# EAGLE board SparkFun_TensorFlow_Ambiq_Apollo3-Panel (EAGLE 9.2.2), part 1 of 5
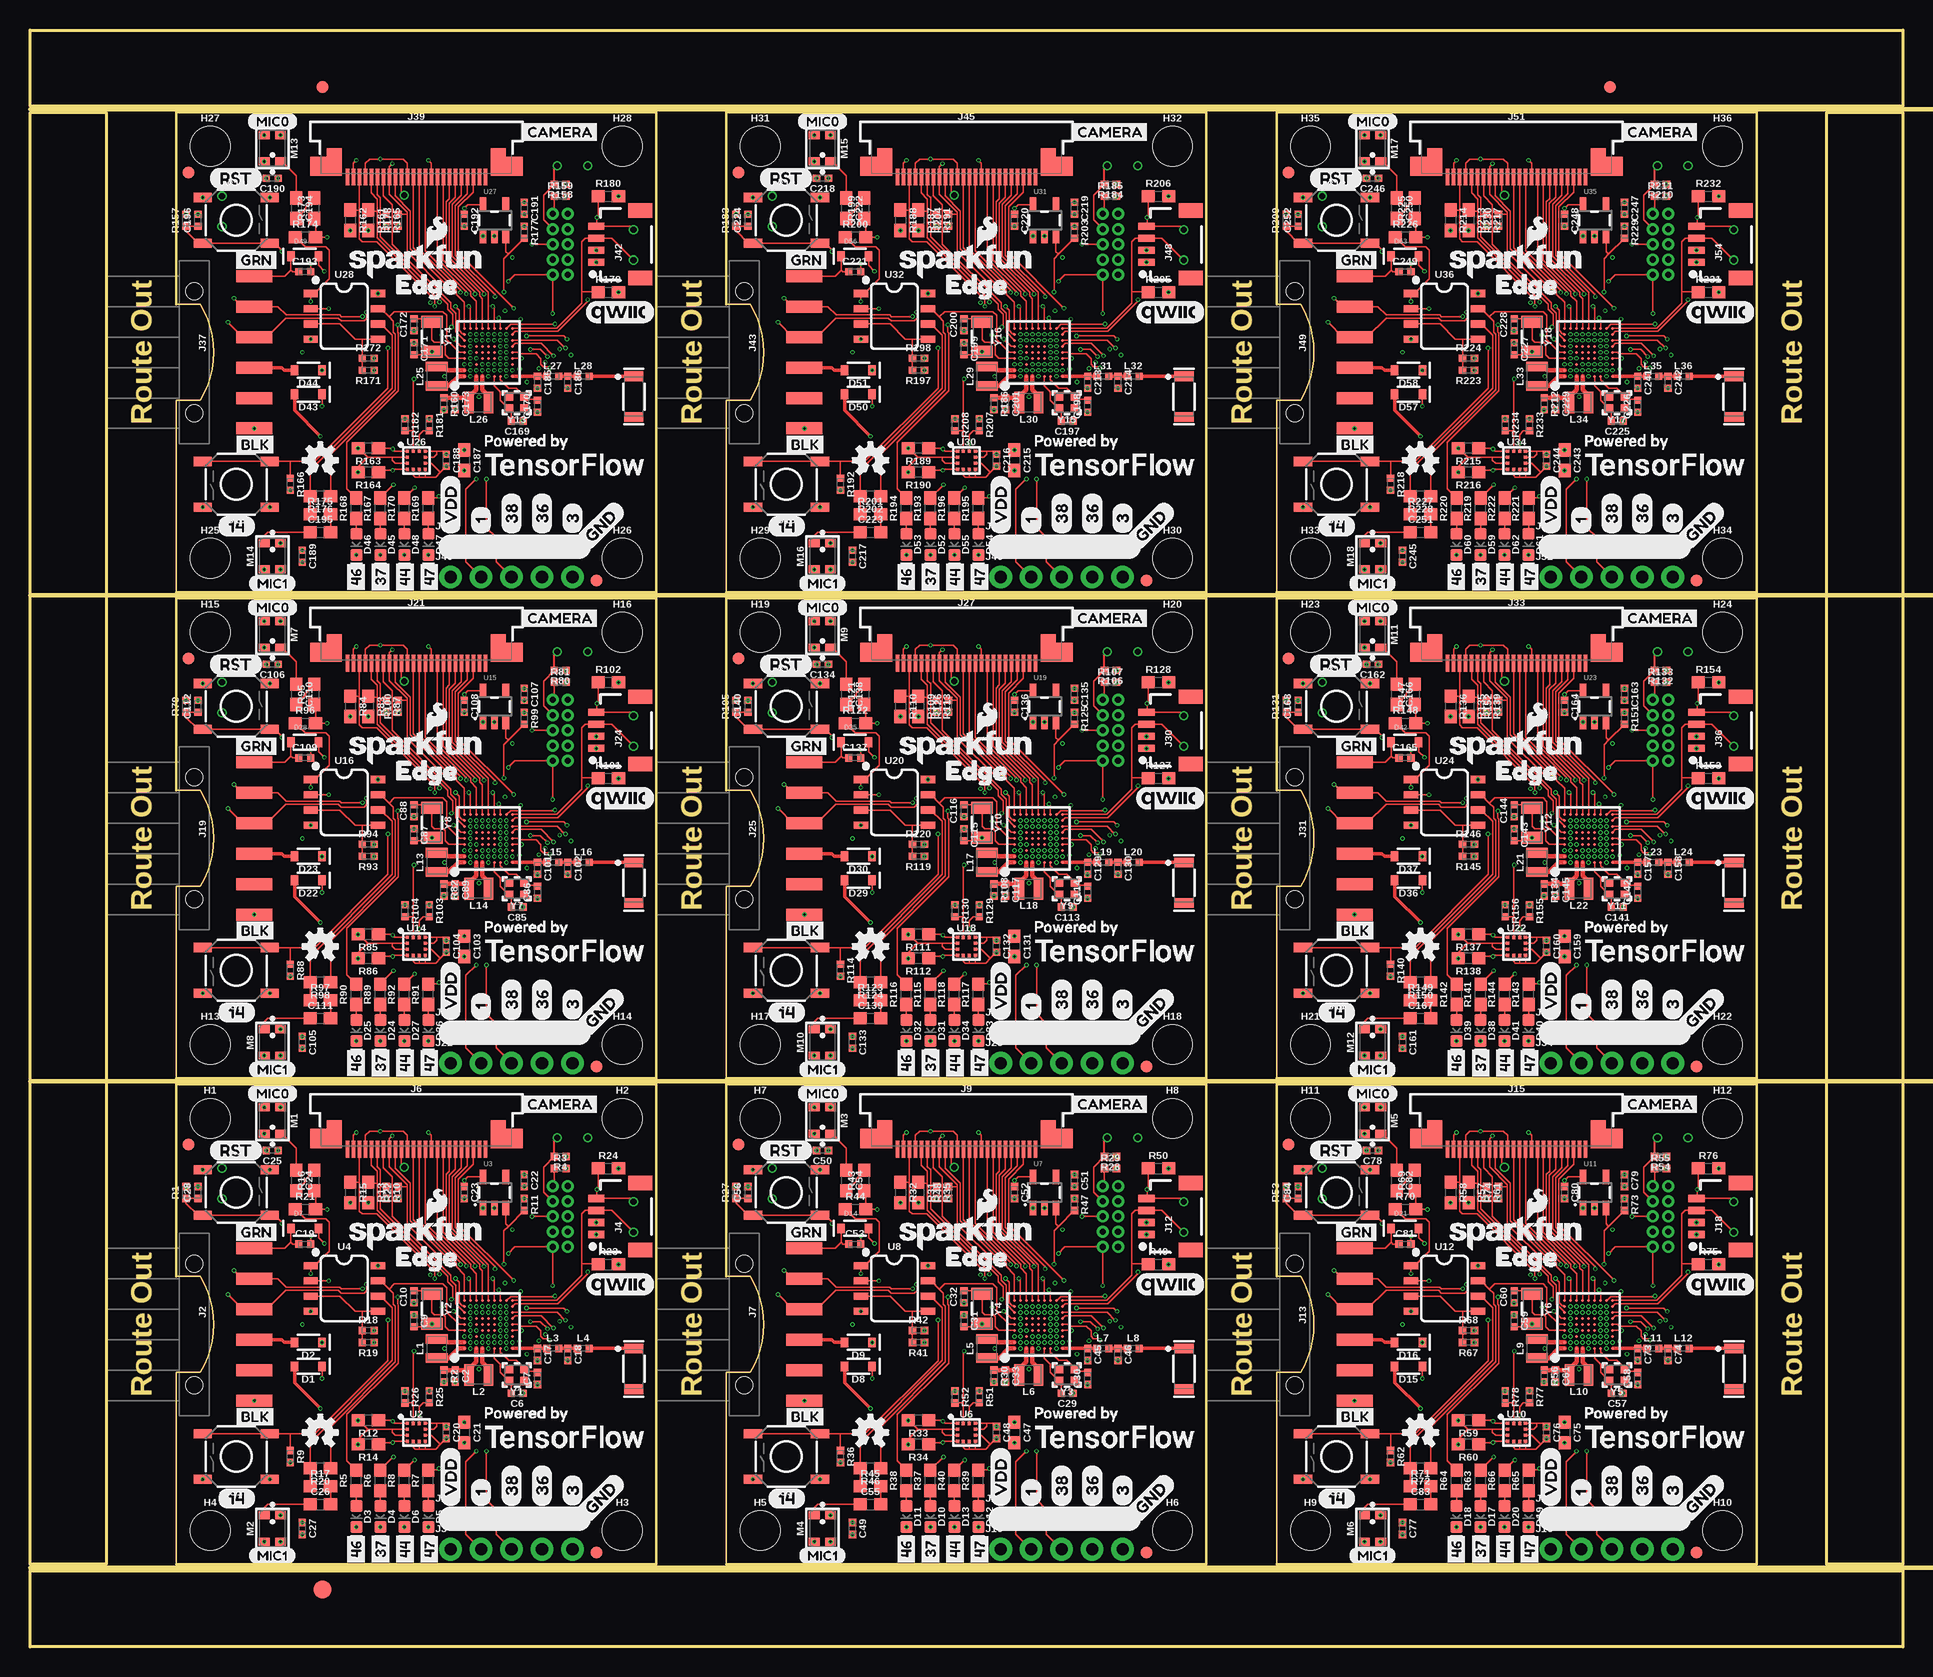
[diagram p0: board, top side]
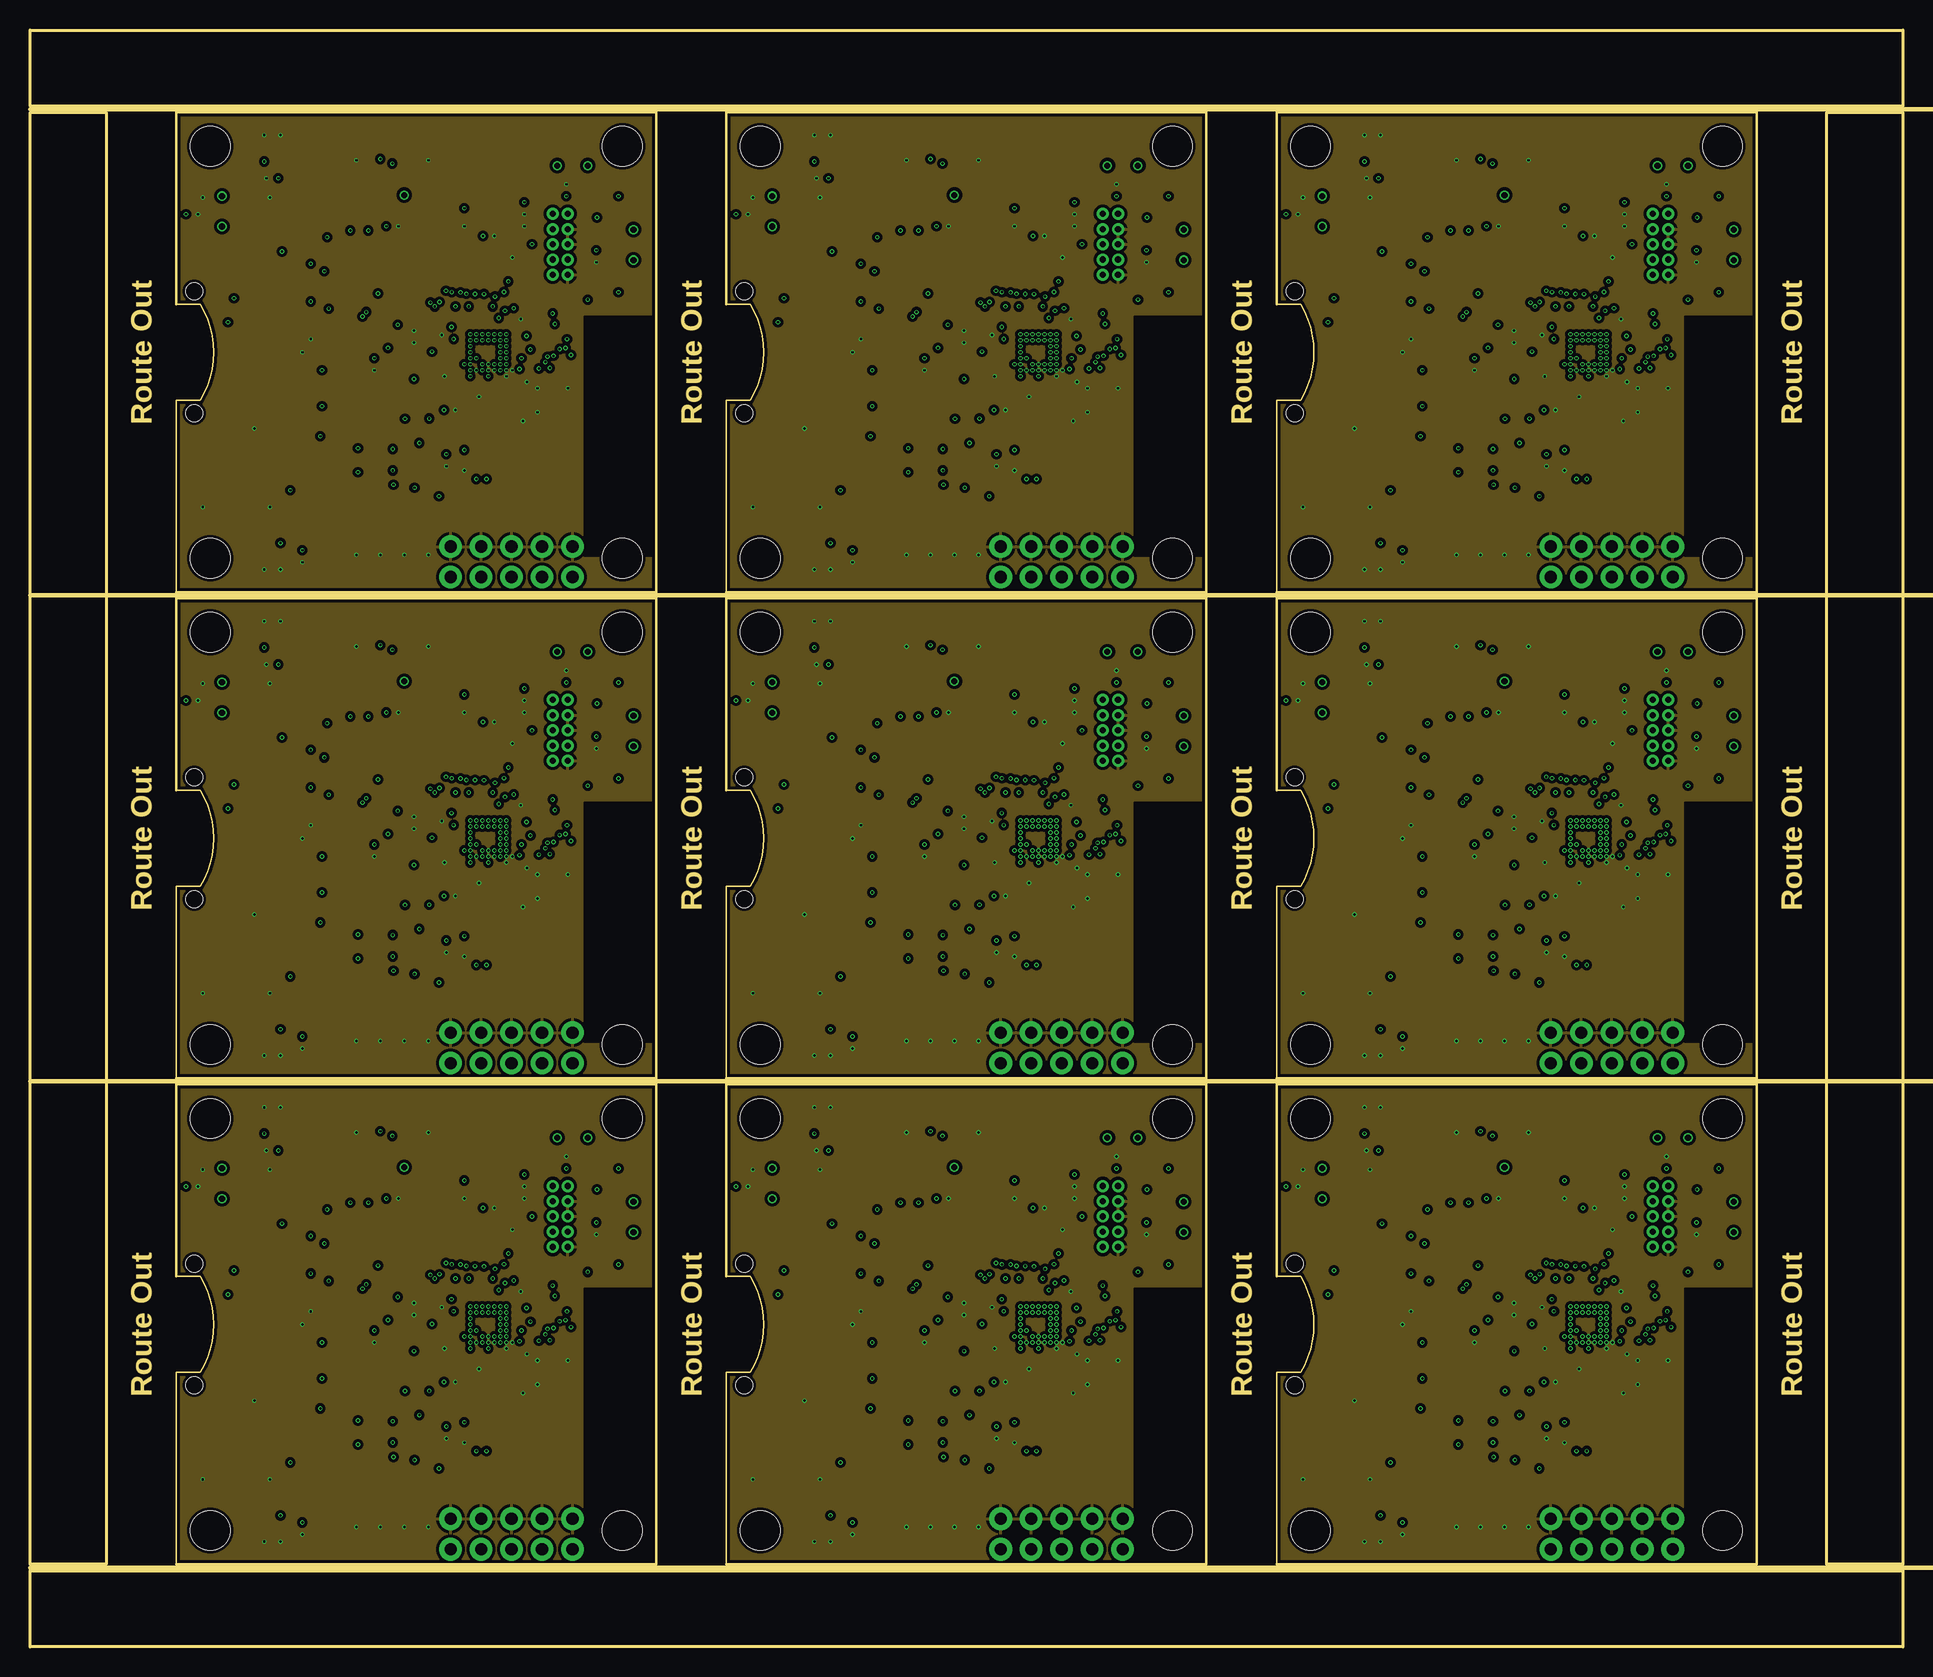
[diagram p1: board, inner layer Route2]
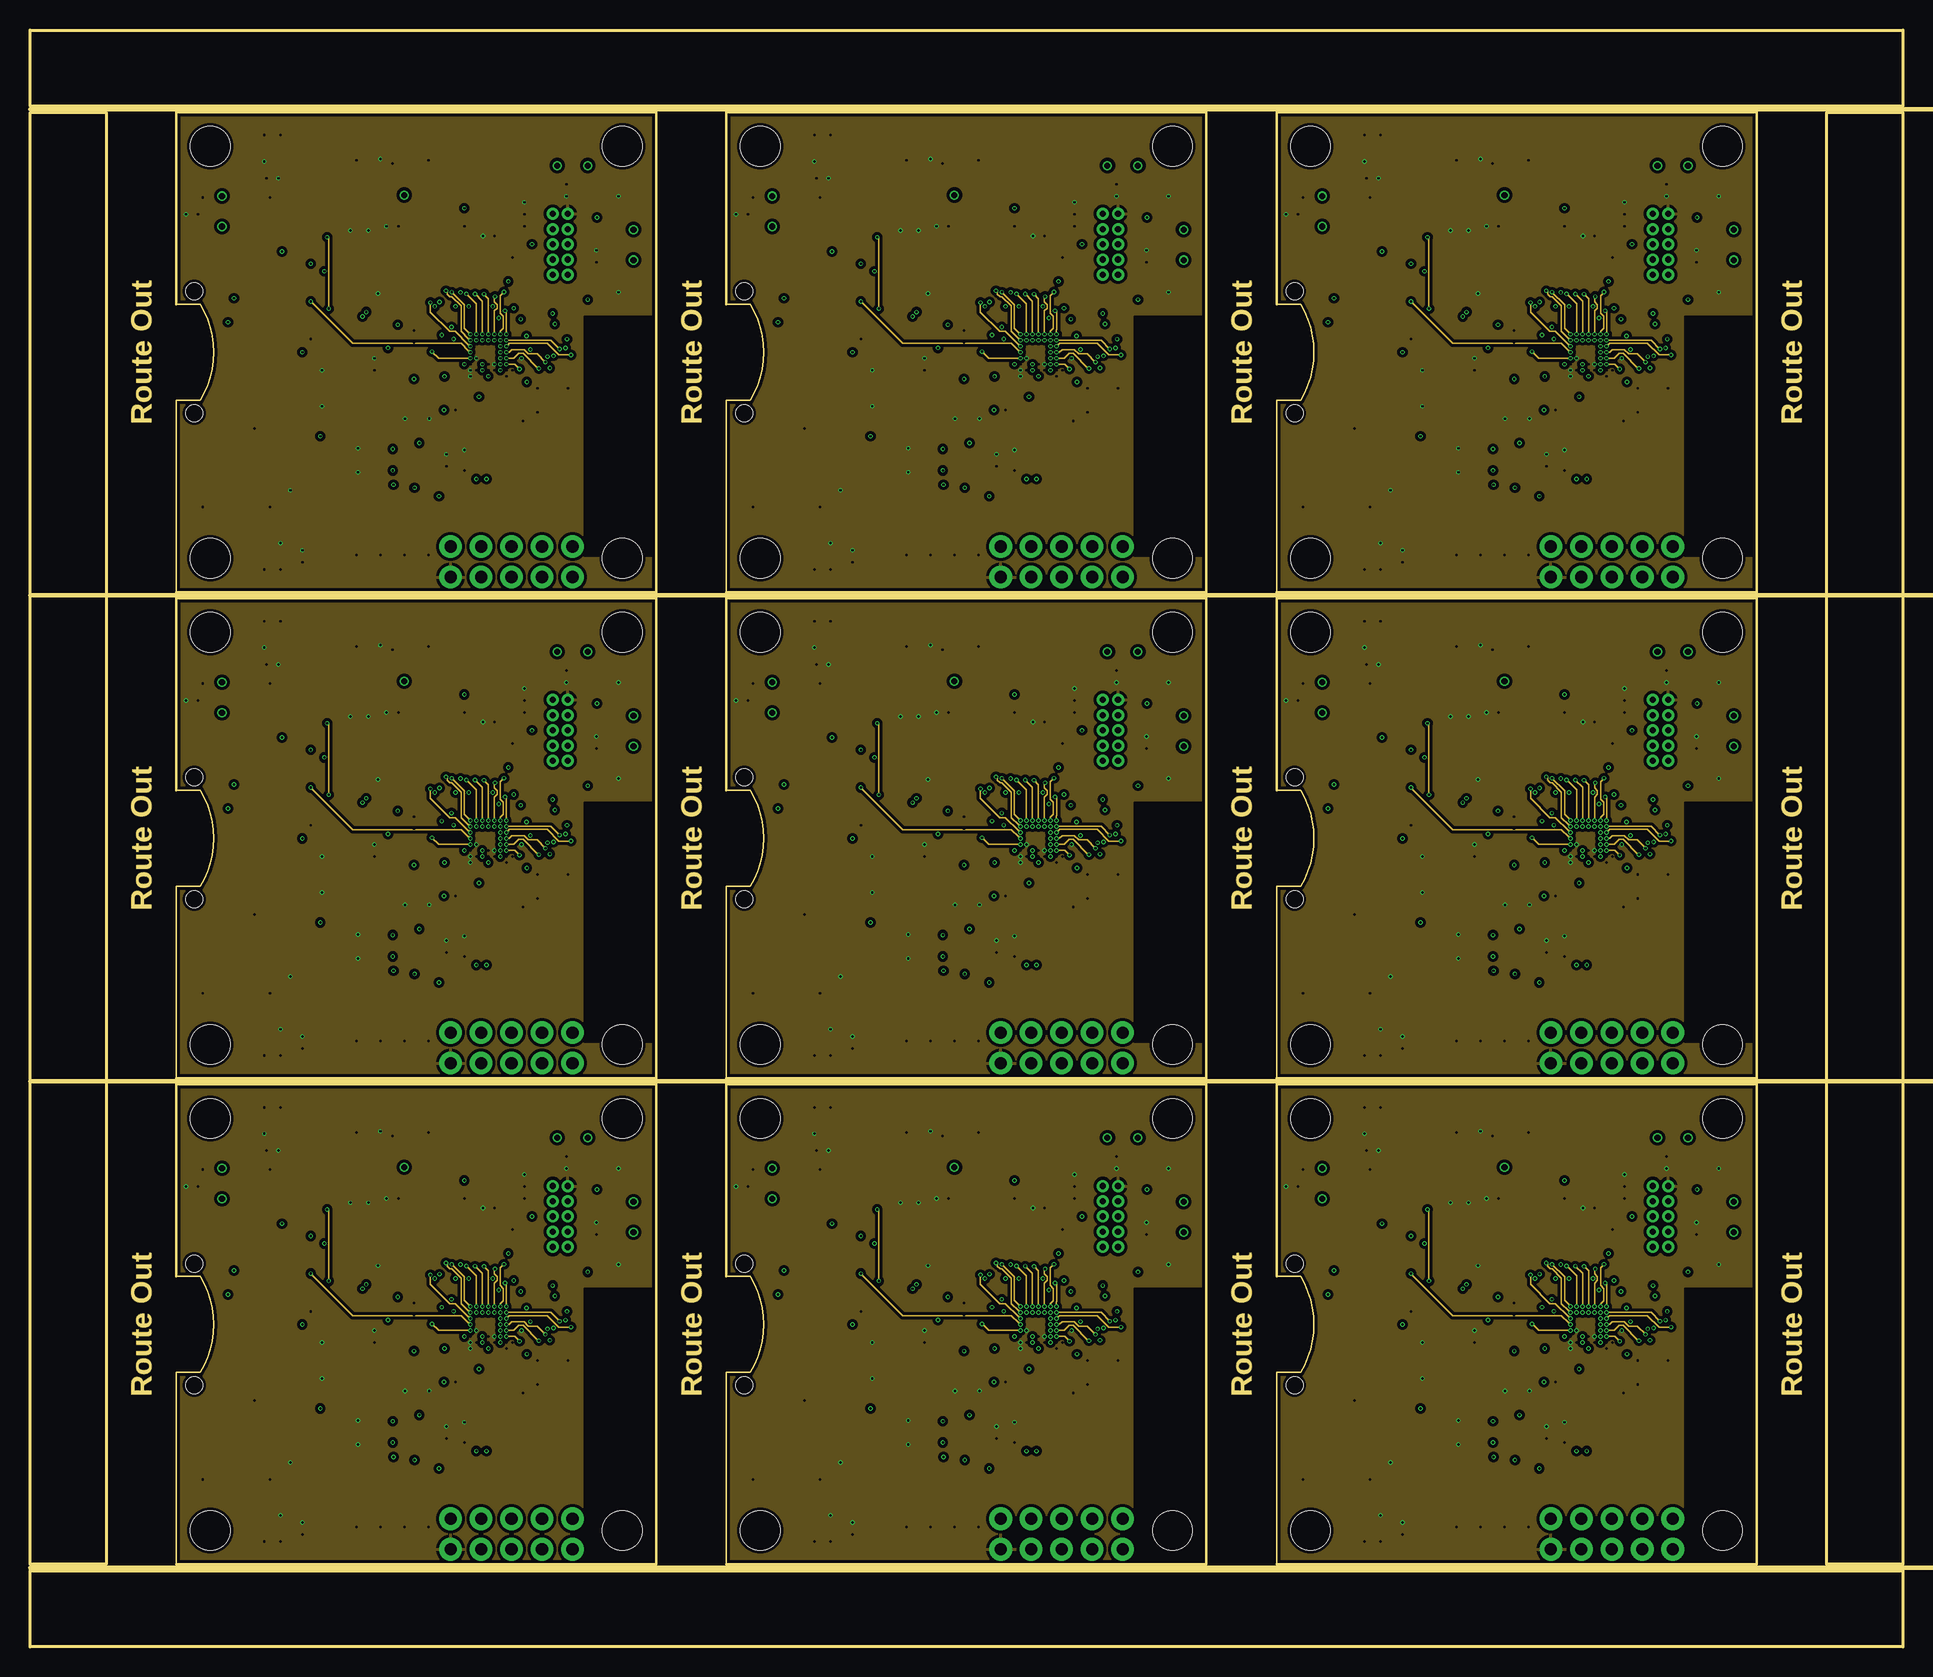
[diagram p2: board, inner layer Route15]
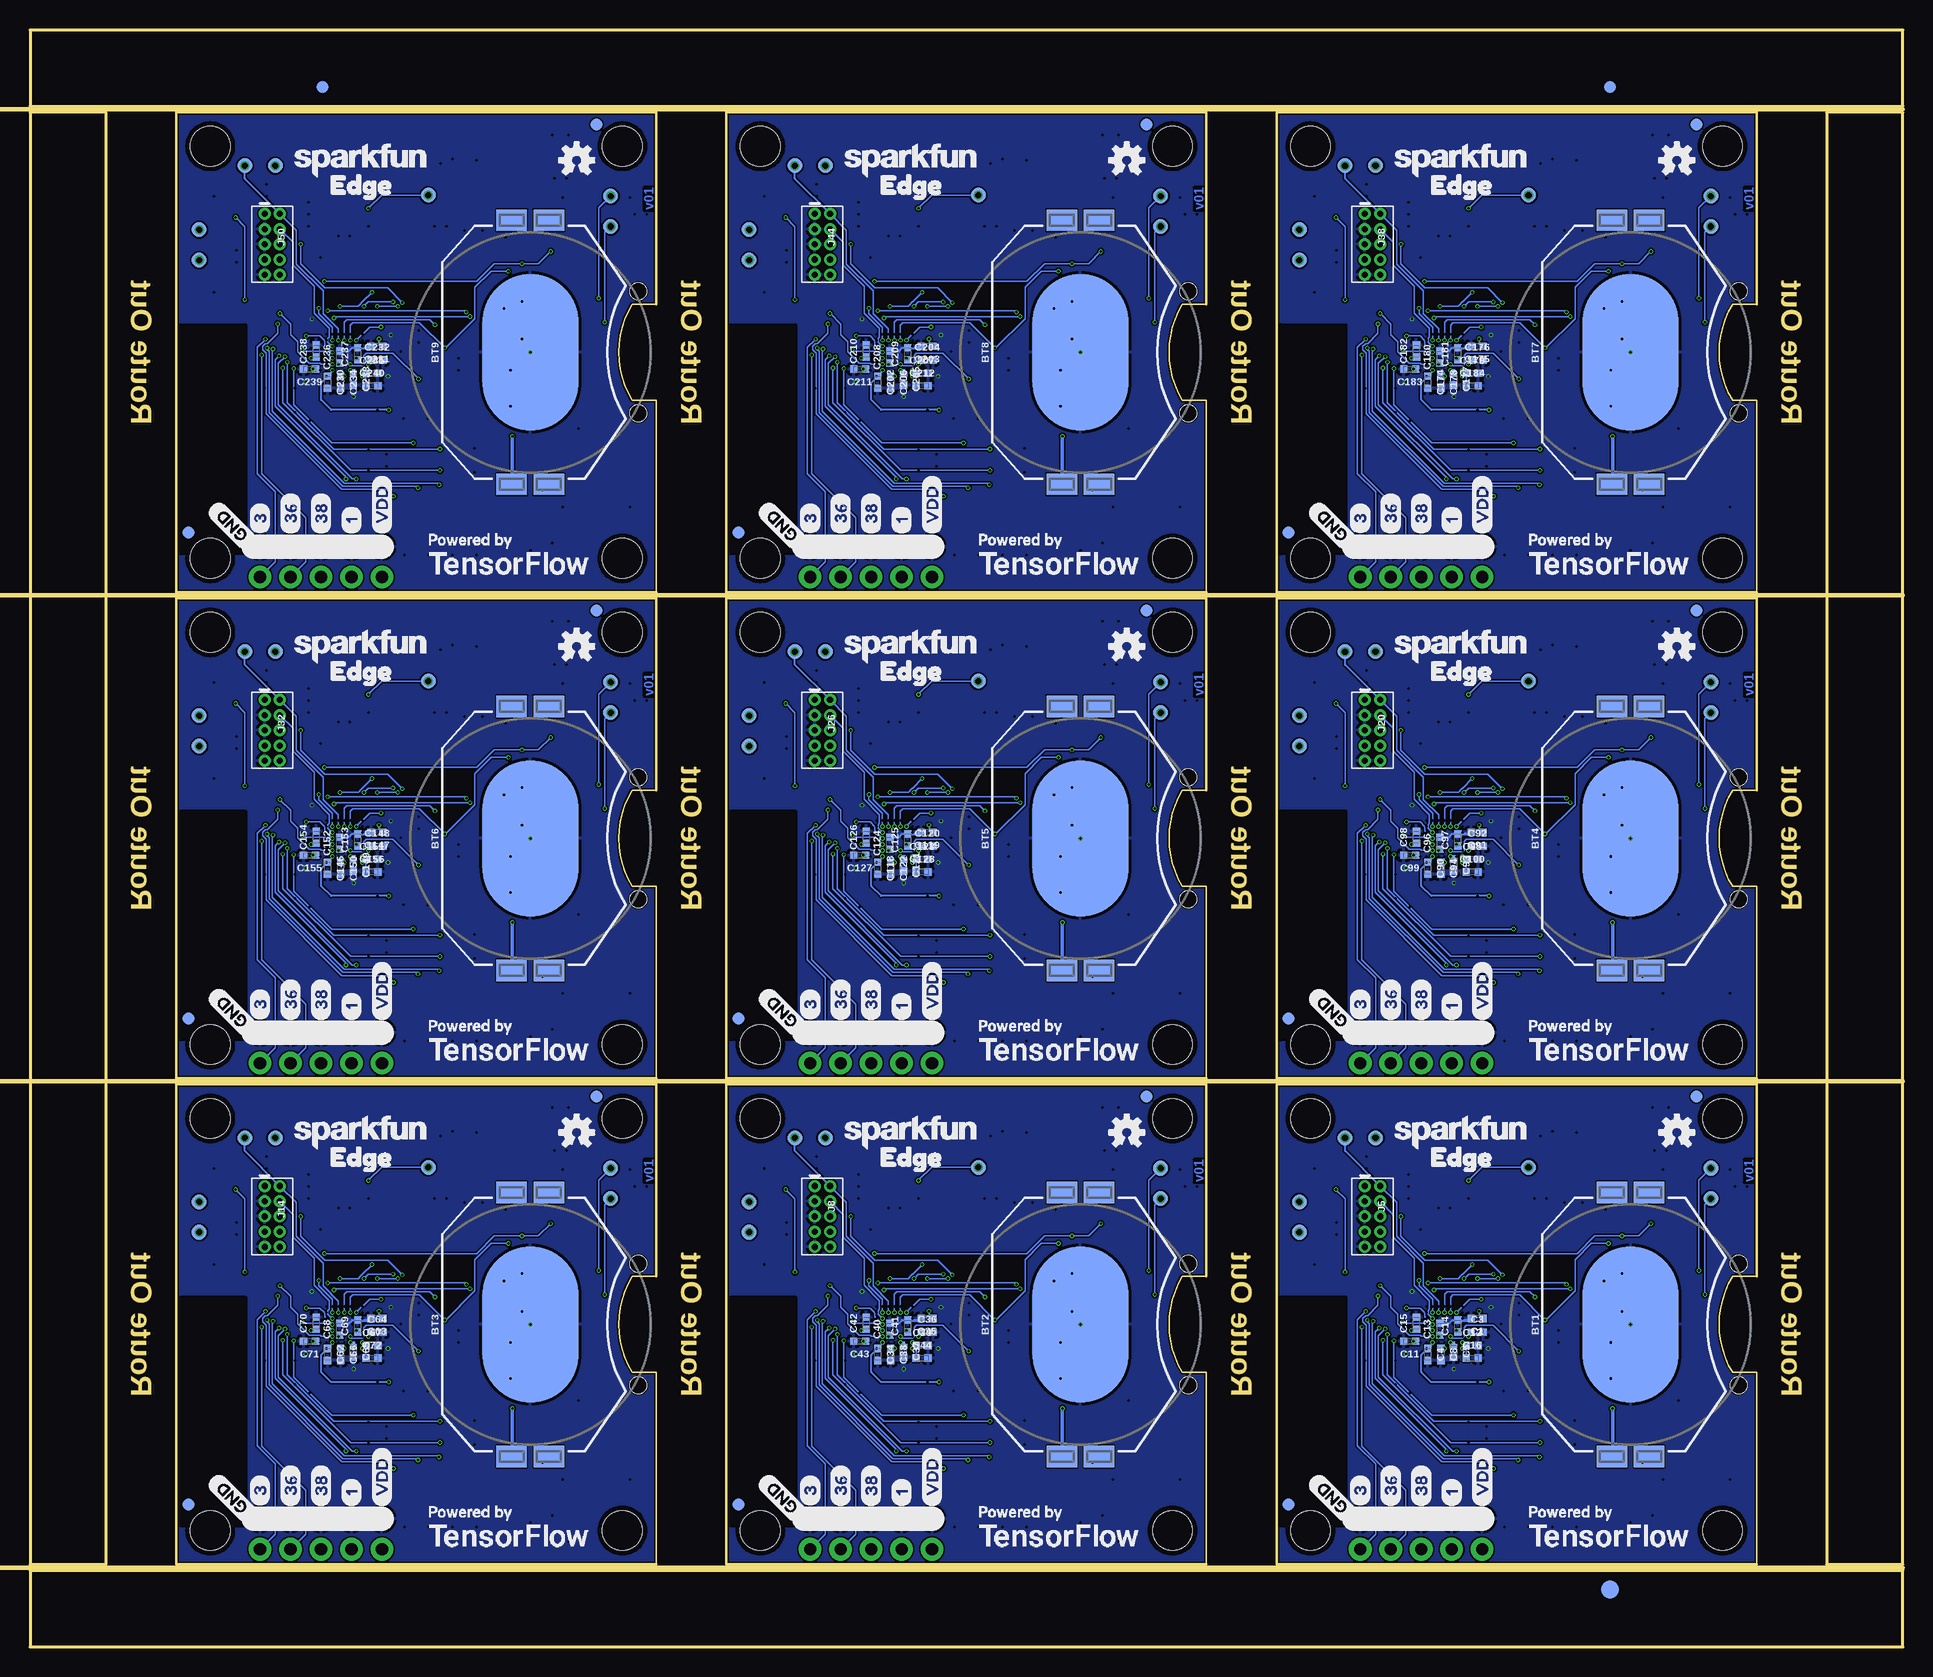
[diagram p3: board, bottom side, seen from below]

Size 156.07 x 134.73 mm. Coordinates in mm from the lower left corner, seen from the top.
Outline: 12.19,6.86 52.19,6.86 52.19,46.86 12.19,46.86 12.19,30.86 14.19,30.86 arc-62 14.19,22.86 12.19,22.86 12.19,6.86
Outline: 58.03,6.86 98.03,6.86 98.03,46.86 58.03,46.86 58.03,30.86 60.03,30.86 arc-62 60.03,22.86 58.03,22.86 58.03,6.86
Outline: 103.88,6.86 143.88,6.86 143.88,46.86 103.88,46.86 103.88,30.86 105.88,30.86 arc-62 105.88,22.86 103.88,22.86 103.88,6.86
Outline: 12.19,47.37 52.19,47.37 52.19,87.37 12.19,87.37 12.19,71.37 14.19,71.37 arc-62 14.19,63.37 12.19,63.37 12.19,47.37
Outline: 58.03,47.37 98.03,47.37 98.03,87.37 58.03,87.37 58.03,71.37 60.03,71.37 arc-62 60.03,63.37 58.03,63.37 58.03,47.37
Outline: 103.88,47.37 143.88,47.37 143.88,87.37 103.88,87.37 103.88,71.37 105.88,71.37 arc-62 105.88,63.37 103.88,63.37 103.88,47.37
Outline: 12.19,87.87 52.19,87.87 52.19,127.87 12.19,127.87 12.19,111.87 14.19,111.87 arc-62 14.19,103.87 12.19,103.87 12.19,87.87
Outline: 58.03,87.87 98.03,87.87 98.03,127.87 58.03,127.87 58.03,111.87 60.03,111.87 arc-62 60.03,103.87 58.03,103.87 58.03,87.87
Outline: 103.88,87.87 143.88,87.87 143.88,127.87 103.88,127.87 103.88,111.87 105.88,111.87 arc-62 105.88,103.87 103.88,103.87 103.88,87.87
Outline: 0,6.35 156.07,6.35 156.07,0 0,0 0,6.35
Outline: 149.72,127.87 156.07,127.87 156.07,6.86 149.72,6.86 149.72,127.87
Outline: 0,134.73 156.07,134.73 156.07,128.38 0,128.38 0,134.73
Outline: 0,127.87 6.35,127.87 6.35,6.86 0,6.86 0,127.87
Copper layers ([15:(1*2)+15*16]): Top 0.035mm / dielectric 0.213359375mm / Route2 0.035mm / dielectric 1.0161mm / Route15 0.035mm / dielectric 0.213359375mm / Bottom 0.035mm
Design rules "SparkFun-4-layer-PCBWAY-LIMIT": minimum track width 5mil, minimum drill 0.2mm, track to track 5mil, track to pad 5mil, pad to pad 5mil, via to via 5mil, smd to smd 0mil, copper to edge 5mil, drill to drill 5mil, minimum pad ring 3mil, minimum via ring 3mil, stop-mask expansion 4mil, vias tented up to drill 25mil, thermal gap 10mil
Net classes: 0 default: width 0 mm, drill 0 mm
Milling: 4 lines

## Footprints (pad centres in the part's own frame; a part is rotated, then mirrored left to right if it is on the bottom)
ANT-2.4GHZ-3.2X1.6X1.2MM = smd 0.8 x 1.6: FEED -1.7,0; NC 1.7,0
BATTCON_20MM_4LEGS_OVERPASTE_INNER = smd 1.778 x 2.54: 1 -11,1.55; 3 11,1.55; P$1 -11,-1.55; P$2 11,-1.55 | smd 13 x 8: 2 0,0
0402-TIGHT = smd 0.6 x 0.6: 1 -0.5,0; 2 0.5,0
0603 = smd 1.1 x 1: 1 -0.85,0; 2 0.85,0
SOD-323@1 = smd 0.63 x 0.83: A 1.15,0; C -1.15,0
LED-0603 = smd 1 x 1: A -0.877,0; C 0.877,0
SOD-323 = smd 0.63 x 0.83: A 1.15,0; C -1.15,0
FIDUCIAL-1X2 = smd 1 x 1: 1 0,0
FIDUCIAL-1.5X3 = smd 1.5 x 1.5: 1 0,0
STAND-OFF = hole 3.302: 0,0
1X05_NO_SILK = drill 1.016 pad 1.88: 1 0,0; 2 2.54,0; 3 5.08,0; 4 7.62,0; 5 10.16,0
1X06-SMD_RA_MALE = smd 1 x 3: 1 -6.35,5; 2 -3.81,5; 3 -1.27,5; 4 1.27,5; 5 3.81,5; 6 6.35,5 | hole 1.4: -5.08,0; 5.08,0
1X04_1MM_RA = smd 0.6 x 1.35: 1 -1.5,0; 2 -0.5,0; 3 0.5,0; 4 1.5,0 | smd 1.2 x 2: NC1 2.8,-3.675; NC2 -2.8,-3.675
2X5-PTH-1.27MM = drill 0.508 pad 1: 1 -2.54,-0.635; 2 -2.54,0.635; 3 -1.27,-0.635; 4 -1.27,0.635; 5 0,-0.635; 6 0,0.635; 7 1.27,-0.635; 8 1.27,0.635; 9 2.54,-0.635; 10 2.54,0.635
FPC-24-AMPHENOL-SFV24R-1STE1HLF = smd 0.3 x 1.4: 1 5.75,2.4; 2 5.25,2.4; 3 4.75,2.4; 4 4.25,2.4; 5 3.75,2.4; 6 3.25,2.4; 7 2.75,2.4; 8 2.25,2.4; 9 1.75,2.4; 10 1.25,2.4; 11 0.75,2.4; 12 0.25,2.4; 13 -0.25,2.4; 14 -0.75,2.4; 15 -1.25,2.4; 16 -1.75,2.4; 17 -2.25,2.4; 18 -2.75,2.4; 19 -3.25,2.4; 20 -3.75,2.4; 21 -4.25,2.4; 22 -4.75,2.4; 23 -5.25,2.4; 24 -5.75,2.4 | smd 1.4 x 1.6: MNT1@0 -8.15,1.5; MNT2@1 8.15,1.5 | smd 1.25 x 2.3: MNT1@1 -6.825,1.15; MNT2@0 6.825,1.15
0805-WIDE = smd 0.8 x 1.8: 1 -0.8,0; 2 0.8,0
SPW2430HR5H-B = smd 0.9 x 0.66: 1 -0.675,1.095; 2 -0.675,-1.095; 3 0.675,-1.095; 4 0.675,1.095
TACTILE_SWITCH_SMD_5.2MM = smd 1.524 x 0.762: 1 -2.794,1.905; 2 2.794,1.905; 3 -2.794,-1.905; 4 2.794,-1.905
PAD.03X.05 = smd 1.27 x 1.27: P$1 0,0
BGA-81-5X5MM = smd 0.254 x 0.254: A1 -2,2; A2 -1.5,2; A3 -1,2; A4 -0.5,2; A5 0,2; A6 0.5,2; A7 1,2; A8 1.5,2; A9 2,2; B1 -2,1.5; B2 -1.5,1.5; B3 -1,1.5; B4 -0.5,1.5; B5 0,1.5; B6 0.5,1.5; B7 1,1.5; B8 1.5,1.5; B9 2,1.5; C1 -2,1; C2 -1.5,1; C3 -1,1; C4 -0.5,1; C5 0,1; C6 0.5,1; C7 1,1; C8 1.5,1; C9 2,1; D1 -2,0.5; D2 -1.5,0.5; D3 -1,0.5; D4 -0.5,0.5; D5 0,0.5; D6 0.5,0.5; D7 1,0.5; D8 1.5,0.5; D9 2,0.5; E1 -2,0; E2 -1.5,0; E3 -1,0; E4 -0.5,0; E5 0,0; E6 0.5,0; E7 1,0; E8 1.5,0; E9 2,0; F1 -2,-0.5; F2 -1.5,-0.5; F3 -1,-0.5; F4 -0.5,-0.5; F5 0,-0.5; F6 0.5,-0.5; F7 1,-0.5; F8 1.5,-0.5; F9 2,-0.5; G1 -2,-1; G2 -1.5,-1; G3 -1,-1; G4 -0.5,-1; G5 0,-1; G6 0.5,-1; G7 1,-1; G8 1.5,-1; G9 2,-1; H1 -2,-1.5; H2 -1.5,-1.5; H3 -1,-1.5; H4 -0.5,-1.5; H5 0,-1.5; H6 0.5,-1.5; H7 1,-1.5; H8 1.5,-1.5; H9 2,-1.5; J1 -2,-2; J2 -1.5,-2; J3 -1,-2; J4 -0.5,-2; J5 0,-2; J6 0.5,-2; J7 1,-2; J8 1.5,-2; J9 2,-2
LGA-12-LISDH12 = smd 0.275 x 0.25: 1 -0.75,0.75; 2 -0.75,0.25; 3 -0.75,-0.25; 4 -0.75,-0.75; 7 0.75,-0.75; 8 0.75,-0.25; 9 0.75,0.25; 10 0.75,0.75 | smd 0.25 x 0.275: 5 -0.25,-0.75; 6 0.25,-0.75; 11 0.25,0.75; 12 -0.25,0.75
SOT23-5 = smd 0.55 x 1.2: 1 -0.95,-1.3; 2 0,-1.3; 3 0.95,-1.3; 4 0.95,1.3; 5 -0.95,1.3
SO08 = smd 0.6 x 1.2: 1 -1.905,-2.8; 2 -0.635,-2.8; 3 0.635,-2.8; 4 1.905,-2.8; 5 1.905,2.8; 6 0.635,2.8; 7 -0.635,2.8; 8 -1.905,2.8
CRYSTAL-SMD-2.0X1.6MM = smd 0.75 x 0.7: 1 -0.675,-0.5; 2 0.675,-0.5; 3 0.675,0.5; 4 -0.675,0.5
CRYSTAL-SMD-3.2X1.5MM = smd 1 x 1.8: P$1 -1.25,0; P$2 1.25,0

## Placement (x,y rotation side)
A1  2.4GHZ-3.2X1.6MM  [ANT-2.4GHZ-3.2X1.6X1.2MM]  50.32,23.16 270 top
A2  2.4GHZ-3.2X1.6MM  [ANT-2.4GHZ-3.2X1.6X1.2MM]  96.16,23.16 270 top
A3  2.4GHZ-3.2X1.6MM  [ANT-2.4GHZ-3.2X1.6X1.2MM]  142,23.16 270 top
A4  2.4GHZ-3.2X1.6MM  [ANT-2.4GHZ-3.2X1.6X1.2MM]  50.32,63.67 270 top
A5  2.4GHZ-3.2X1.6MM  [ANT-2.4GHZ-3.2X1.6X1.2MM]  96.16,63.67 270 top
A6  2.4GHZ-3.2X1.6MM  [ANT-2.4GHZ-3.2X1.6X1.2MM]  142,63.67 270 top
A7  2.4GHZ-3.2X1.6MM  [ANT-2.4GHZ-3.2X1.6X1.2MM]  50.32,104.17 270 top
A8  2.4GHZ-3.2X1.6MM  [ANT-2.4GHZ-3.2X1.6X1.2MM]  96.16,104.17 270 top
A9  2.4GHZ-3.2X1.6MM  [ANT-2.4GHZ-3.2X1.6X1.2MM]  142,104.17 270 top
BT1  [BATTCON_20MM_4LEGS_OVERPASTE_INNER]  22.69,26.86 90 bottom
BT2  [BATTCON_20MM_4LEGS_OVERPASTE_INNER]  68.53,26.86 90 bottom
BT3  [BATTCON_20MM_4LEGS_OVERPASTE_INNER]  114.38,26.86 90 bottom
BT4  [BATTCON_20MM_4LEGS_OVERPASTE_INNER]  22.69,67.37 90 bottom
BT5  [BATTCON_20MM_4LEGS_OVERPASTE_INNER]  68.53,67.37 90 bottom
BT6  [BATTCON_20MM_4LEGS_OVERPASTE_INNER]  114.38,67.37 90 bottom
BT7  [BATTCON_20MM_4LEGS_OVERPASTE_INNER]  22.69,107.87 90 bottom
BT8  [BATTCON_20MM_4LEGS_OVERPASTE_INNER]  68.53,107.87 90 bottom
BT9  [BATTCON_20MM_4LEGS_OVERPASTE_INNER]  114.38,107.87 90 bottom
C1  0.47uF  [0402-TIGHT]  35.47,27.36 180 bottom
C2  4.7uF  [0402-TIGHT]  35.44,22.56 270 top
C3  2.2uF  [0402-TIGHT]  35.47,26.21 0 bottom
C4  1.0uF  [0402-TIGHT]  39.59,24.36 270 bottom
C5  2.2uF  [0402-TIGHT]  37.44,24.63 270 bottom
C6  6pF  [0402-TIGHT]  40.59,21.13 180 top
C7  6pF  [0402-TIGHT]  42.29,22.36 90 top
C8  2.2uF  [0402-TIGHT]  38.49,24.36 270 bottom
C9  15pF  [0402-TIGHT]  31.99,27.16 270 top
C10  15pF  [0402-TIGHT]  31.99,29.16 90 top
C11  47nF  [0402-TIGHT]  41.09,25.46 180 bottom
C12  1.0uF  [0402-TIGHT]  35.89,25.11 0 bottom
C13  1.0uF  [0402-TIGHT]  38.57,26.46 90 bottom
C14  1.0uF  [0402-TIGHT]  37.07,26.73 90 bottom
C15  1.0uF  [0402-TIGHT]  40.53,26.96 90 bottom
C16  2.2uF  [0402-TIGHT]  35.89,24.06 0 bottom
C17  DNP  [0402-TIGHT]  42.29,24.36 270 top
C18  0.5pF  [0402-TIGHT]  44.82,24.36 270 top
C19  0.1uF  [0402-TIGHT]  22.89,33.56 0 top
C20  0.1uF  [0402-TIGHT]  34.69,17.86 270 top
C21  10uF  [0603]  36.19,17.86 270 top
C22  1.0uF  [0402-TIGHT]  41.19,38.86 270 top
C23  1.0uF  [0402-TIGHT]  36.19,37.86 270 top
C24  4.7uF  [0603]  22.19,38.86 270 top
C25  0.1uF  [0402-TIGHT]  20.19,41.36 180 top
C26  4.7uF  [0603]  24.19,11.86 0 top
C27  0.1uF  [0402-TIGHT]  22.69,9.86 270 top
C28  1.0nF  [0402-TIGHT]  13.99,37.86 90 top
C29  6pF  [0402-TIGHT]  86.43,21.13 180 top
C30  6pF  [0402-TIGHT]  88.13,22.36 90 top
C31  15pF  [0402-TIGHT]  77.83,27.16 270 top
C32  15pF  [0402-TIGHT]  77.83,29.16 90 top
C33  4.7uF  [0402-TIGHT]  81.28,22.56 270 top
C34  1.0uF  [0402-TIGHT]  85.43,24.36 270 bottom
C35  0.47uF  [0402-TIGHT]  81.31,27.36 180 bottom
C36  2.2uF  [0402-TIGHT]  81.31,26.21 0 bottom
C37  2.2uF  [0402-TIGHT]  83.28,24.63 270 bottom
C38  2.2uF  [0402-TIGHT]  84.33,24.36 270 bottom
C39  1.0uF  [0402-TIGHT]  81.73,25.11 0 bottom
C40  1.0uF  [0402-TIGHT]  84.41,26.46 90 bottom
C41  1.0uF  [0402-TIGHT]  82.92,26.73 90 bottom
C42  1.0uF  [0402-TIGHT]  86.37,26.96 90 bottom
C43  47nF  [0402-TIGHT]  86.93,25.46 180 bottom
C44  2.2uF  [0402-TIGHT]  81.73,24.06 0 bottom
C45  DNP  [0402-TIGHT]  88.13,24.36 270 top
C46  0.5pF  [0402-TIGHT]  90.67,24.36 270 top
C47  10uF  [0603]  82.03,17.86 270 top
C48  0.1uF  [0402-TIGHT]  80.53,17.86 270 top
C49  0.1uF  [0402-TIGHT]  68.53,9.86 270 top
C50  0.1uF  [0402-TIGHT]  66.03,41.36 180 top
C51  1.0uF  [0402-TIGHT]  87.03,38.86 270 top
C52  1.0uF  [0402-TIGHT]  82.03,37.86 270 top
C53  0.1uF  [0402-TIGHT]  68.73,33.56 0 top
C54  4.7uF  [0603]  68.03,38.86 270 top
C55  4.7uF  [0603]  70.03,11.86 0 top
C56  1.0nF  [0402-TIGHT]  59.83,37.86 90 top
C57  6pF  [0402-TIGHT]  132.28,21.13 180 top
C58  6pF  [0402-TIGHT]  133.98,22.36 90 top
C59  15pF  [0402-TIGHT]  123.68,27.16 270 top
C60  15pF  [0402-TIGHT]  123.68,29.16 90 top
C61  4.7uF  [0402-TIGHT]  127.13,22.56 270 top
C62  1.0uF  [0402-TIGHT]  131.28,24.36 270 bottom
C63  0.47uF  [0402-TIGHT]  127.15,27.36 180 bottom
C64  2.2uF  [0402-TIGHT]  127.15,26.21 0 bottom
C65  2.2uF  [0402-TIGHT]  129.13,24.63 270 bottom
C66  2.2uF  [0402-TIGHT]  130.18,24.36 270 bottom
C67  1.0uF  [0402-TIGHT]  127.58,25.11 0 bottom
C68  1.0uF  [0402-TIGHT]  130.25,26.46 90 bottom
C69  1.0uF  [0402-TIGHT]  128.76,26.73 90 bottom
C70  1.0uF  [0402-TIGHT]  132.21,26.96 90 bottom
C71  47nF  [0402-TIGHT]  132.78,25.46 180 bottom
C72  2.2uF  [0402-TIGHT]  127.58,24.06 0 bottom
C73  DNP  [0402-TIGHT]  133.98,24.36 270 top
C74  0.5pF  [0402-TIGHT]  136.51,24.36 270 top
C75  10uF  [0603]  127.88,17.86 270 top
C76  0.1uF  [0402-TIGHT]  126.38,17.86 270 top
C77  0.1uF  [0402-TIGHT]  114.38,9.86 270 top
C78  0.1uF  [0402-TIGHT]  111.88,41.36 180 top
C79  1.0uF  [0402-TIGHT]  132.88,38.86 270 top
C80  1.0uF  [0402-TIGHT]  127.88,37.86 270 top
C81  0.1uF  [0402-TIGHT]  114.58,33.56 0 top
C82  4.7uF  [0603]  113.88,38.86 270 top
C83  4.7uF  [0603]  115.88,11.86 0 top
C84  1.0nF  [0402-TIGHT]  105.68,37.86 90 top
C85  6pF  [0402-TIGHT]  40.59,61.64 180 top
C86  6pF  [0402-TIGHT]  42.29,62.87 90 top
C87  15pF  [0402-TIGHT]  31.99,67.67 270 top
C88  15pF  [0402-TIGHT]  31.99,69.67 90 top
C89  4.7uF  [0402-TIGHT]  35.44,63.07 270 top
C90  1.0uF  [0402-TIGHT]  39.59,64.87 270 bottom
C91  0.47uF  [0402-TIGHT]  35.47,67.87 180 bottom
C92  2.2uF  [0402-TIGHT]  35.47,66.72 0 bottom
C93  2.2uF  [0402-TIGHT]  37.44,65.14 270 bottom
C94  2.2uF  [0402-TIGHT]  38.49,64.87 270 bottom
C95  1.0uF  [0402-TIGHT]  35.89,65.62 0 bottom
C96  1.0uF  [0402-TIGHT]  38.57,66.97 90 bottom
C97  1.0uF  [0402-TIGHT]  37.07,67.24 90 bottom
C98  1.0uF  [0402-TIGHT]  40.53,67.47 90 bottom
C99  47nF  [0402-TIGHT]  41.09,65.97 180 bottom
C100  2.2uF  [0402-TIGHT]  35.89,64.57 0 bottom
C101  DNP  [0402-TIGHT]  42.29,64.87 270 top
C102  0.5pF  [0402-TIGHT]  44.82,64.87 270 top
C103  10uF  [0603]  36.19,58.37 270 top
C104  0.1uF  [0402-TIGHT]  34.69,58.37 270 top
C105  0.1uF  [0402-TIGHT]  22.69,50.37 270 top
C106  0.1uF  [0402-TIGHT]  20.19,81.87 180 top
C107  1.0uF  [0402-TIGHT]  41.19,79.37 270 top
C108  1.0uF  [0402-TIGHT]  36.19,78.37 270 top
C109  0.1uF  [0402-TIGHT]  22.89,74.07 0 top
C110  4.7uF  [0603]  22.19,79.37 270 top
C111  4.7uF  [0603]  24.19,52.37 0 top
C112  1.0nF  [0402-TIGHT]  13.99,78.37 90 top
C113  6pF  [0402-TIGHT]  86.43,61.64 180 top
C114  6pF  [0402-TIGHT]  88.13,62.87 90 top
C115  15pF  [0402-TIGHT]  77.83,67.67 270 top
C116  15pF  [0402-TIGHT]  77.83,69.67 90 top
C117  4.7uF  [0402-TIGHT]  81.28,63.07 270 top
C118  1.0uF  [0402-TIGHT]  85.43,64.87 270 bottom
C119  0.47uF  [0402-TIGHT]  81.31,67.87 180 bottom
C120  2.2uF  [0402-TIGHT]  81.31,66.72 0 bottom
C121  2.2uF  [0402-TIGHT]  83.28,65.14 270 bottom
C122  2.2uF  [0402-TIGHT]  84.33,64.87 270 bottom
C123  1.0uF  [0402-TIGHT]  81.73,65.62 0 bottom
C124  1.0uF  [0402-TIGHT]  84.41,66.97 90 bottom
C125  1.0uF  [0402-TIGHT]  82.92,67.24 90 bottom
C126  1.0uF  [0402-TIGHT]  86.37,67.47 90 bottom
C127  47nF  [0402-TIGHT]  86.93,65.97 180 bottom
C128  2.2uF  [0402-TIGHT]  81.73,64.57 0 bottom
C129  DNP  [0402-TIGHT]  88.13,64.87 270 top
C130  0.5pF  [0402-TIGHT]  90.67,64.87 270 top
C131  10uF  [0603]  82.03,58.37 270 top
C132  0.1uF  [0402-TIGHT]  80.53,58.37 270 top
C133  0.1uF  [0402-TIGHT]  68.53,50.37 270 top
C134  0.1uF  [0402-TIGHT]  66.03,81.87 180 top
C135  1.0uF  [0402-TIGHT]  87.03,79.37 270 top
C136  1.0uF  [0402-TIGHT]  82.03,78.37 270 top
C137  0.1uF  [0402-TIGHT]  68.73,74.07 0 top
C138  4.7uF  [0603]  68.03,79.37 270 top
C139  4.7uF  [0603]  70.03,52.37 0 top
C140  1.0nF  [0402-TIGHT]  59.83,78.37 90 top
C141  6pF  [0402-TIGHT]  132.28,61.64 180 top
C142  6pF  [0402-TIGHT]  133.98,62.87 90 top
C143  15pF  [0402-TIGHT]  123.68,67.67 270 top
C144  15pF  [0402-TIGHT]  123.68,69.67 90 top
C145  4.7uF  [0402-TIGHT]  127.13,63.07 270 top
C146  1.0uF  [0402-TIGHT]  131.28,64.87 270 bottom
C147  0.47uF  [0402-TIGHT]  127.15,67.87 180 bottom
C148  2.2uF  [0402-TIGHT]  127.15,66.72 0 bottom
C149  2.2uF  [0402-TIGHT]  129.13,65.14 270 bottom
C150  2.2uF  [0402-TIGHT]  130.18,64.87 270 bottom
C151  1.0uF  [0402-TIGHT]  127.58,65.62 0 bottom
C152  1.0uF  [0402-TIGHT]  130.25,66.97 90 bottom
C153  1.0uF  [0402-TIGHT]  128.76,67.24 90 bottom
C154  1.0uF  [0402-TIGHT]  132.21,67.47 90 bottom
C155  47nF  [0402-TIGHT]  132.78,65.97 180 bottom
C156  2.2uF  [0402-TIGHT]  127.58,64.57 0 bottom
C157  DNP  [0402-TIGHT]  133.98,64.87 270 top
C158  0.5pF  [0402-TIGHT]  136.51,64.87 270 top
C159  10uF  [0603]  127.88,58.37 270 top
C160  0.1uF  [0402-TIGHT]  126.38,58.37 270 top
C161  0.1uF  [0402-TIGHT]  114.38,50.37 270 top
C162  0.1uF  [0402-TIGHT]  111.88,81.87 180 top
C163  1.0uF  [0402-TIGHT]  132.88,79.37 270 top
C164  1.0uF  [0402-TIGHT]  127.88,78.37 270 top
C165  0.1uF  [0402-TIGHT]  114.58,74.07 0 top
C166  4.7uF  [0603]  113.88,79.37 270 top
C167  4.7uF  [0603]  115.88,52.37 0 top
C168  1.0nF  [0402-TIGHT]  105.68,78.37 90 top
C169  6pF  [0402-TIGHT]  40.59,102.15 180 top
C170  6pF  [0402-TIGHT]  42.29,103.37 90 top
C171  15pF  [0402-TIGHT]  31.99,108.17 270 top
C172  15pF  [0402-TIGHT]  31.99,110.17 90 top
C173  4.7uF  [0402-TIGHT]  35.44,103.57 270 top
C174  1.0uF  [0402-TIGHT]  39.59,105.37 270 bottom
C175  0.47uF  [0402-TIGHT]  35.47,108.37 180 bottom
C176  2.2uF  [0402-TIGHT]  35.47,107.22 0 bottom
C177  2.2uF  [0402-TIGHT]  37.44,105.65 270 bottom
C178  2.2uF  [0402-TIGHT]  38.49,105.37 270 bottom
C179  1.0uF  [0402-TIGHT]  35.89,106.12 0 bottom
C180  1.0uF  [0402-TIGHT]  38.57,107.48 90 bottom
C181  1.0uF  [0402-TIGHT]  37.07,107.75 90 bottom
C182  1.0uF  [0402-TIGHT]  40.53,107.97 90 bottom
C183  47nF  [0402-TIGHT]  41.09,106.47 180 bottom
C184  2.2uF  [0402-TIGHT]  35.89,105.07 0 bottom
C185  DNP  [0402-TIGHT]  42.29,105.37 270 top
C186  0.5pF  [0402-TIGHT]  44.82,105.37 270 top
C187  10uF  [0603]  36.19,98.87 270 top
C188  0.1uF  [0402-TIGHT]  34.69,98.87 270 top
C189  0.1uF  [0402-TIGHT]  22.69,90.87 270 top
C190  0.1uF  [0402-TIGHT]  20.19,122.37 180 top
C191  1.0uF  [0402-TIGHT]  41.19,119.87 270 top
C192  1.0uF  [0402-TIGHT]  36.19,118.87 270 top
C193  0.1uF  [0402-TIGHT]  22.89,114.57 0 top
C194  4.7uF  [0603]  22.19,119.87 270 top
C195  4.7uF  [0603]  24.19,92.87 0 top
C196  1.0nF  [0402-TIGHT]  13.99,118.87 90 top
C197  6pF  [0402-TIGHT]  86.43,102.15 180 top
C198  6pF  [0402-TIGHT]  88.13,103.37 90 top
C199  15pF  [0402-TIGHT]  77.83,108.17 270 top
C200  15pF  [0402-TIGHT]  77.83,110.17 90 top
C201  4.7uF  [0402-TIGHT]  81.28,103.57 270 top
C202  1.0uF  [0402-TIGHT]  85.43,105.37 270 bottom
C203  0.47uF  [0402-TIGHT]  81.31,108.37 180 bottom
C204  2.2uF  [0402-TIGHT]  81.31,107.22 0 bottom
C205  2.2uF  [0402-TIGHT]  83.28,105.65 270 bottom
C206  2.2uF  [0402-TIGHT]  84.33,105.37 270 bottom
C207  1.0uF  [0402-TIGHT]  81.73,106.12 0 bottom
C208  1.0uF  [0402-TIGHT]  84.41,107.48 90 bottom
C209  1.0uF  [0402-TIGHT]  82.92,107.75 90 bottom
C210  1.0uF  [0402-TIGHT]  86.37,107.97 90 bottom
C211  47nF  [0402-TIGHT]  86.93,106.47 180 bottom
C212  2.2uF  [0402-TIGHT]  81.73,105.07 0 bottom
C213  DNP  [0402-TIGHT]  88.13,105.37 270 top
C214  0.5pF  [0402-TIGHT]  90.67,105.37 270 top
C215  10uF  [0603]  82.03,98.87 270 top
C216  0.1uF  [0402-TIGHT]  80.53,98.87 270 top
C217  0.1uF  [0402-TIGHT]  68.53,90.87 270 top
C218  0.1uF  [0402-TIGHT]  66.03,122.37 180 top
C219  1.0uF  [0402-TIGHT]  87.03,119.87 270 top
C220  1.0uF  [0402-TIGHT]  82.03,118.87 270 top
C221  0.1uF  [0402-TIGHT]  68.73,114.57 0 top
C222  4.7uF  [0603]  68.03,119.87 270 top
C223  4.7uF  [0603]  70.03,92.87 0 top
C224  1.0nF  [0402-TIGHT]  59.83,118.87 90 top
C225  6pF  [0402-TIGHT]  132.28,102.15 180 top
C226  6pF  [0402-TIGHT]  133.98,103.37 90 top
C227  15pF  [0402-TIGHT]  123.68,108.17 270 top
C228  15pF  [0402-TIGHT]  123.68,110.17 90 top
C229  4.7uF  [0402-TIGHT]  127.13,103.57 270 top
C230  1.0uF  [0402-TIGHT]  131.28,105.37 270 bottom
C231  0.47uF  [0402-TIGHT]  127.15,108.37 180 bottom
C232  2.2uF  [0402-TIGHT]  127.15,107.22 0 bottom
C233  2.2uF  [0402-TIGHT]  129.13,105.65 270 bottom
C234  2.2uF  [0402-TIGHT]  130.18,105.37 270 bottom
C235  1.0uF  [0402-TIGHT]  127.58,106.12 0 bottom
C236  1.0uF  [0402-TIGHT]  130.25,107.48 90 bottom
C237  1.0uF  [0402-TIGHT]  128.76,107.75 90 bottom
C238  1.0uF  [0402-TIGHT]  132.21,107.97 90 bottom
C239  47nF  [0402-TIGHT]  132.78,106.47 180 bottom
C240  2.2uF  [0402-TIGHT]  127.58,105.07 0 bottom
C241  DNP  [0402-TIGHT]  133.98,105.37 270 top
C242  0.5pF  [0402-TIGHT]  136.51,105.37 270 top
C243  10uF  [0603]  127.88,98.87 270 top
C244  0.1uF  [0402-TIGHT]  126.38,98.87 270 top
C245  0.1uF  [0402-TIGHT]  114.38,90.87 270 top
C246  0.1uF  [0402-TIGHT]  111.88,122.37 180 top
C247  1.0uF  [0402-TIGHT]  132.88,119.87 270 top
C248  1.0uF  [0402-TIGHT]  127.88,118.87 270 top
C249  0.1uF  [0402-TIGHT]  114.58,114.57 0 top
C250  4.7uF  [0603]  113.88,119.87 270 top
C251  4.7uF  [0603]  115.88,92.87 0 top
C252  1.0nF  [0402-TIGHT]  105.68,118.87 90 top
D1  1A/23V/620mV  [SOD-323@1]  23.19,23.36 180 top
D2  1A/23V/620mV  [SOD-323@1]  23.19,25.36 180 top
D3  RED  [LED-0603]  27.19,10.86 270 top
D4  BLUE  [LED-0603]  29.19,10.86 270 top
D5  Yellow  [LED-0603]  33.19,10.86 270 top
D6  GREEN  [LED-0603]  31.19,10.86 270 top
D7  250mA/100V  [SOD-323]  22.89,34.86 0 top
D8  1A/23V/620mV  [SOD-323@1]  69.03,23.36 180 top
D9  1A/23V/620mV  [SOD-323@1]  69.03,25.36 180 top
D10  BLUE  [LED-0603]  75.03,10.86 270 top
D11  RED  [LED-0603]  73.03,10.86 270 top
D12  Yellow  [LED-0603]  79.03,10.86 270 top
D13  GREEN  [LED-0603]  77.03,10.86 270 top
D14  250mA/100V  [SOD-323]  68.73,34.86 0 top
D15  1A/23V/620mV  [SOD-323@1]  114.88,23.36 180 top
D16  1A/23V/620mV  [SOD-323@1]  114.88,25.36 180 top
D17  BLUE  [LED-0603]  120.88,10.86 270 top
D18  RED  [LED-0603]  118.88,10.86 270 top
D19  Yellow  [LED-0603]  124.88,10.86 270 top
D20  GREEN  [LED-0603]  122.88,10.86 270 top
D21  250mA/100V  [SOD-323]  114.58,34.86 0 top
D22  1A/23V/620mV  [SOD-323@1]  23.19,63.87 180 top
D23  1A/23V/620mV  [SOD-323@1]  23.19,65.87 180 top
D24  BLUE  [LED-0603]  29.19,51.37 270 top
D25  RED  [LED-0603]  27.19,51.37 270 top
D26  Yellow  [LED-0603]  33.19,51.37 270 top
D27  GREEN  [LED-0603]  31.19,51.37 270 top
D28  250mA/100V  [SOD-323]  22.89,75.37 0 top
D29  1A/23V/620mV  [SOD-323@1]  69.03,63.87 180 top
D30  1A/23V/620mV  [SOD-323@1]  69.03,65.87 180 top
D31  BLUE  [LED-0603]  75.03,51.37 270 top
D32  RED  [LED-0603]  73.03,51.37 270 top
D33  Yellow  [LED-0603]  79.03,51.37 270 top
D34  GREEN  [LED-0603]  77.03,51.37 270 top
D35  250mA/100V  [SOD-323]  68.73,75.37 0 top
D36  1A/23V/620mV  [SOD-323@1]  114.88,63.87 180 top
D37  1A/23V/620mV  [SOD-323@1]  114.88,65.87 180 top
D38  BLUE  [LED-0603]  120.88,51.37 270 top
D39  RED  [LED-0603]  118.88,51.37 270 top
D40  Yellow  [LED-0603]  124.88,51.37 270 top
D41  GREEN  [LED-0603]  122.88,51.37 270 top
D42  250mA/100V  [SOD-323]  114.58,75.37 0 top
D43  1A/23V/620mV  [SOD-323@1]  23.19,104.37 180 top
D44  1A/23V/620mV  [SOD-323@1]  23.19,106.37 180 top
D45  BLUE  [LED-0603]  29.19,91.87 270 top
D46  RED  [LED-0603]  27.19,91.87 270 top
D47  Yellow  [LED-0603]  33.19,91.87 270 top
D48  GREEN  [LED-0603]  31.19,91.87 270 top
D49  250mA/100V  [SOD-323]  22.89,115.87 0 top
D50  1A/23V/620mV  [SOD-323@1]  69.03,104.37 180 top
D51  1A/23V/620mV  [SOD-323@1]  69.03,106.37 180 top
D52  BLUE  [LED-0603]  75.03,91.87 270 top
D53  RED  [LED-0603]  73.03,91.87 270 top
D54  Yellow  [LED-0603]  79.03,91.87 270 top
D55  GREEN  [LED-0603]  77.03,91.87 270 top
D56  250mA/100V  [SOD-323]  68.73,115.87 0 top
D57  1A/23V/620mV  [SOD-323@1]  114.88,104.37 180 top
D58  1A/23V/620mV  [SOD-323@1]  114.88,106.37 180 top
D59  BLUE  [LED-0603]  120.88,91.87 270 top
D60  RED  [LED-0603]  118.88,91.87 270 top
D61  Yellow  [LED-0603]  124.88,91.87 270 top
D62  GREEN  [LED-0603]  122.88,91.87 270 top
D63  250mA/100V  [SOD-323]  114.58,115.87 0 top
E$1  [FIDUCIAL-1X2]  24.38,129.97 0 top
E$2  [FIDUCIAL-1X2]  24.38,129.97 0 bottom
E$3  [FIDUCIAL-1X2]  131.68,129.97 0 top
E$4  [FIDUCIAL-1X2]  131.68,129.97 0 bottom
E$5  [FIDUCIAL-1.5X3]  24.38,4.76 0 top
E$6  [FIDUCIAL-1.5X3]  24.38,4.76 0 bottom
FD1  FIDUCIAL1X2  [FIDUCIAL-1X2]  13.19,41.86 0 top
FD2  FIDUCIAL1X2  [FIDUCIAL-1X2]  47.19,7.86 0 top
FD3  FIDUCIAL1X2  [FIDUCIAL-1X2]  51.19,11.86 0 bottom
FD4  FIDUCIAL1X2  [FIDUCIAL-1X2]  17.19,45.86 0 bottom
FD5  FIDUCIAL1X2  [FIDUCIAL-1X2]  63.03,45.86 0 bottom
FD6  FIDUCIAL1X2  [FIDUCIAL-1X2]  97.03,11.86 0 bottom
FD7  FIDUCIAL1X2  [FIDUCIAL-1X2]  59.03,41.86 0 top
FD8  FIDUCIAL1X2  [FIDUCIAL-1X2]  93.03,7.86 0 top
FD9  FIDUCIAL1X2  [FIDUCIAL-1X2]  108.88,45.86 0 bottom
FD10  FIDUCIAL1X2  [FIDUCIAL-1X2]  142.88,11.86 0 bottom
FD11  FIDUCIAL1X2  [FIDUCIAL-1X2]  104.88,41.86 0 top
FD12  FIDUCIAL1X2  [FIDUCIAL-1X2]  138.88,7.86 0 top
FD13  FIDUCIAL1X2  [FIDUCIAL-1X2]  17.19,86.37 0 bottom
FD14  FIDUCIAL1X2  [FIDUCIAL-1X2]  51.19,52.37 0 bottom
FD15  FIDUCIAL1X2  [FIDUCIAL-1X2]  13.19,82.37 0 top
FD16  FIDUCIAL1X2  [FIDUCIAL-1X2]  47.19,48.37 0 top
FD17  FIDUCIAL1X2  [FIDUCIAL-1X2]  63.03,86.37 0 bottom
FD18  FIDUCIAL1X2  [FIDUCIAL-1X2]  97.03,52.37 0 bottom
FD19  FIDUCIAL1X2  [FIDUCIAL-1X2]  59.03,82.37 0 top
FD20  FIDUCIAL1X2  [FIDUCIAL-1X2]  93.03,48.37 0 top
FD21  FIDUCIAL1X2  [FIDUCIAL-1X2]  108.88,86.37 0 bottom
FD22  FIDUCIAL1X2  [FIDUCIAL-1X2]  142.88,52.37 0 bottom
FD23  FIDUCIAL1X2  [FIDUCIAL-1X2]  104.88,82.37 0 top
FD24  FIDUCIAL1X2  [FIDUCIAL-1X2]  138.88,48.37 0 top
FD25  FIDUCIAL1X2  [FIDUCIAL-1X2]  17.19,126.87 0 bottom
FD26  FIDUCIAL1X2  [FIDUCIAL-1X2]  51.19,92.87 0 bottom
FD27  FIDUCIAL1X2  [FIDUCIAL-1X2]  13.19,122.87 0 top
FD28  FIDUCIAL1X2  [FIDUCIAL-1X2]  47.19,88.87 0 top
FD29  FIDUCIAL1X2  [FIDUCIAL-1X2]  63.03,126.87 0 bottom
FD30  FIDUCIAL1X2  [FIDUCIAL-1X2]  97.03,92.87 0 bottom
FD31  FIDUCIAL1X2  [FIDUCIAL-1X2]  59.03,122.87 0 top
FD32  FIDUCIAL1X2  [FIDUCIAL-1X2]  93.03,88.87 0 top
FD33  FIDUCIAL1X2  [FIDUCIAL-1X2]  108.88,126.87 0 bottom
FD34  FIDUCIAL1X2  [FIDUCIAL-1X2]  142.88,92.87 0 bottom
FD35  FIDUCIAL1X2  [FIDUCIAL-1X2]  104.88,122.87 0 top
FD36  FIDUCIAL1X2  [FIDUCIAL-1X2]  138.88,88.87 0 top
H1  STAND-OFF  [STAND-OFF]  15.02,44.03 0 top
H2  STAND-OFF  [STAND-OFF]  49.36,44.03 0 top
H3  STAND-OFF  [STAND-OFF]  49.36,9.69 0 top
H4  STAND-OFF  [STAND-OFF]  15.02,9.69 0 top
H5  STAND-OFF  [STAND-OFF]  60.86,9.69 0 top
H6  STAND-OFF  [STAND-OFF]  95.21,9.69 0 top
H7  STAND-OFF  [STAND-OFF]  60.86,44.03 0 top
H8  STAND-OFF  [STAND-OFF]  95.21,44.03 0 top
H9  STAND-OFF  [STAND-OFF]  106.7,9.69 0 top
H10  STAND-OFF  [STAND-OFF]  141.05,9.69 0 top
H11  STAND-OFF  [STAND-OFF]  106.7,44.03 0 top
H12  STAND-OFF  [STAND-OFF]  141.05,44.03 0 top
H13  STAND-OFF  [STAND-OFF]  15.02,50.19 0 top
H14  STAND-OFF  [STAND-OFF]  49.36,50.19 0 top
H15  STAND-OFF  [STAND-OFF]  15.02,84.54 0 top
H16  STAND-OFF  [STAND-OFF]  49.36,84.54 0 top
H17  STAND-OFF  [STAND-OFF]  60.86,50.19 0 top
H18  STAND-OFF  [STAND-OFF]  95.21,50.19 0 top
H19  STAND-OFF  [STAND-OFF]  60.86,84.54 0 top
H20  STAND-OFF  [STAND-OFF]  95.21,84.54 0 top
H21  STAND-OFF  [STAND-OFF]  106.7,50.19 0 top
H22  STAND-OFF  [STAND-OFF]  141.05,50.19 0 top
H23  STAND-OFF  [STAND-OFF]  106.7,84.54 0 top
H24  STAND-OFF  [STAND-OFF]  141.05,84.54 0 top
H25  STAND-OFF  [STAND-OFF]  15.02,90.7 0 top
H26  STAND-OFF  [STAND-OFF]  49.36,90.7 0 top
H27  STAND-OFF  [STAND-OFF]  15.02,125.05 0 top
H28  STAND-OFF  [STAND-OFF]  49.36,125.05 0 top
H29  STAND-OFF  [STAND-OFF]  60.86,90.7 0 top
H30  STAND-OFF  [STAND-OFF]  95.21,90.7 0 top
H31  STAND-OFF  [STAND-OFF]  60.86,125.05 0 top
H32  STAND-OFF  [STAND-OFF]  95.21,125.05 0 top
H33  STAND-OFF  [STAND-OFF]  106.7,90.7 0 top
H34  STAND-OFF  [STAND-OFF]  141.05,90.7 0 top
H35  STAND-OFF  [STAND-OFF]  106.7,125.05 0 top
H36  STAND-OFF  [STAND-OFF]  141.05,125.05 0 top
J1  [1X05_NO_SILK]  35.05,10.67 0 top
J2  [1X06-SMD_RA_MALE]  13.69,26.86 270 top
J3  [1X05_NO_SILK]  35.05,8.13 0 top
J4  [1X04_1MM_RA]  47.19,35.86 90 top
J5  CORTEX_DEBUG_PTH  [2X5-PTH-1.27MM]  44.19,35.86 270 bottom
J6  CAMERA-0V7670  [FPC-24-AMPHENOL-SFV24R-1STE1HLF]  32.19,43.86 180 top
J7  [1X06-SMD_RA_MALE]  59.53,26.86 270 top
J8  CORTEX_DEBUG_PTH  [2X5-PTH-1.27MM]  90.03,35.86 270 bottom
J9  CAMERA-0V7670  [FPC-24-AMPHENOL-SFV24R-1STE1HLF]  78.03,43.86 180 top
J10  [1X05_NO_SILK]  80.89,8.13 0 top
J11  [1X05_NO_SILK]  80.89,10.67 0 top
J12  [1X04_1MM_RA]  93.03,35.86 90 top
J13  [1X06-SMD_RA_MALE]  105.38,26.86 270 top
J14  CORTEX_DEBUG_PTH  [2X5-PTH-1.27MM]  135.88,35.86 270 bottom
J15  CAMERA-0V7670  [FPC-24-AMPHENOL-SFV24R-1STE1HLF]  123.88,43.86 180 top
J16  [1X05_NO_SILK]  126.74,8.13 0 top
J17  [1X05_NO_SILK]  126.74,10.67 0 top
J18  [1X04_1MM_RA]  138.88,35.86 90 top
J19  [1X06-SMD_RA_MALE]  13.69,67.37 270 top
J20  CORTEX_DEBUG_PTH  [2X5-PTH-1.27MM]  44.19,76.37 270 bottom
J21  CAMERA-0V7670  [FPC-24-AMPHENOL-SFV24R-1STE1HLF]  32.19,84.37 180 top
J22  [1X05_NO_SILK]  35.05,48.64 0 top
J23  [1X05_NO_SILK]  35.05,51.18 0 top
J24  [1X04_1MM_RA]  47.19,76.37 90 top
J25  [1X06-SMD_RA_MALE]  59.53,67.37 270 top
J26  CORTEX_DEBUG_PTH  [2X5-PTH-1.27MM]  90.03,76.37 270 bottom
J27  CAMERA-0V7670  [FPC-24-AMPHENOL-SFV24R-1STE1HLF]  78.03,84.37 180 top
J28  [1X05_NO_SILK]  80.89,48.64 0 top
J29  [1X05_NO_SILK]  80.89,51.18 0 top
J30  [1X04_1MM_RA]  93.03,76.37 90 top
J31  [1X06-SMD_RA_MALE]  105.38,67.37 270 top
J32  CORTEX_DEBUG_PTH  [2X5-PTH-1.27MM]  135.88,76.37 270 bottom
J33  CAMERA-0V7670  [FPC-24-AMPHENOL-SFV24R-1STE1HLF]  123.88,84.37 180 top
J34  [1X05_NO_SILK]  126.74,48.64 0 top
J35  [1X05_NO_SILK]  126.74,51.18 0 top
J36  [1X04_1MM_RA]  138.88,76.37 90 top
J37  [1X06-SMD_RA_MALE]  13.69,107.87 270 top
J38  CORTEX_DEBUG_PTH  [2X5-PTH-1.27MM]  44.19,116.87 270 bottom
J39  CAMERA-0V7670  [FPC-24-AMPHENOL-SFV24R-1STE1HLF]  32.19,124.87 180 top
J40  [1X05_NO_SILK]  35.05,89.14 0 top
J41  [1X05_NO_SILK]  35.05,91.68 0 top
J42  [1X04_1MM_RA]  47.19,116.87 90 top
J43  [1X06-SMD_RA_MALE]  59.53,107.87 270 top
J44  CORTEX_DEBUG_PTH  [2X5-PTH-1.27MM]  90.03,116.87 270 bottom
J45  CAMERA-0V7670  [FPC-24-AMPHENOL-SFV24R-1STE1HLF]  78.03,124.87 180 top
J46  [1X05_NO_SILK]  80.89,89.14 0 top
J47  [1X05_NO_SILK]  80.89,91.68 0 top
J48  [1X04_1MM_RA]  93.03,116.87 90 top
J49  [1X06-SMD_RA_MALE]  105.38,107.87 270 top
J50  CORTEX_DEBUG_PTH  [2X5-PTH-1.27MM]  135.88,116.87 270 bottom
J51  CAMERA-0V7670  [FPC-24-AMPHENOL-SFV24R-1STE1HLF]  123.88,124.87 180 top
J52  [1X05_NO_SILK]  126.74,89.14 0 top
J53  [1X05_NO_SILK]  126.74,91.68 0 top
J54  [1X04_1MM_RA]  138.88,116.87 90 top
L1  2.2uH  [0805-WIDE]  33.89,24.86 90 top
L2  1.0uH  [0805-WIDE]  37.39,22.66 180 top
L3  2.7nH  [0402-TIGHT]  43.55,24.86 0 top
L4  2.0nH  [0402-TIGHT]  46.09,24.86 0 top
L5  2.2uH  [0805-WIDE]  79.73,24.86 90 top
L6  1.0uH  [0805-WIDE]  83.23,22.66 180 top
L7  2.7nH  [0402-TIGHT]  89.4,24.86 0 top
L8  2.0nH  [0402-TIGHT]  91.94,24.86 0 top
L9  2.2uH  [0805-WIDE]  125.58,24.86 90 top
L10  1.0uH  [0805-WIDE]  129.08,22.66 180 top
L11  2.7nH  [0402-TIGHT]  135.24,24.86 0 top
L12  2.0nH  [0402-TIGHT]  137.78,24.86 0 top
L13  2.2uH  [0805-WIDE]  33.89,65.37 90 top
L14  1.0uH  [0805-WIDE]  37.39,63.17 180 top
L15  2.7nH  [0402-TIGHT]  43.55,65.37 0 top
L16  2.0nH  [0402-TIGHT]  46.09,65.37 0 top
L17  2.2uH  [0805-WIDE]  79.73,65.37 90 top
L18  1.0uH  [0805-WIDE]  83.23,63.17 180 top
L19  2.7nH  [0402-TIGHT]  89.4,65.37 0 top
L20  2.0nH  [0402-TIGHT]  91.94,65.37 0 top
L21  2.2uH  [0805-WIDE]  125.58,65.37 90 top
L22  1.0uH  [0805-WIDE]  129.08,63.17 180 top
L23  2.7nH  [0402-TIGHT]  135.24,65.37 0 top
L24  2.0nH  [0402-TIGHT]  137.78,65.37 0 top
L25  2.2uH  [0805-WIDE]  33.89,105.87 90 top
L26  1.0uH  [0805-WIDE]  37.39,103.67 180 top
L27  2.7nH  [0402-TIGHT]  43.55,105.87 0 top
L28  2.0nH  [0402-TIGHT]  46.09,105.87 0 top
L29  2.2uH  [0805-WIDE]  79.73,105.87 90 top
L30  1.0uH  [0805-WIDE]  83.23,103.67 180 top
L31  2.7nH  [0402-TIGHT]  89.4,105.87 0 top
L32  2.0nH  [0402-TIGHT]  91.94,105.87 0 top
L33  2.2uH  [0805-WIDE]  125.58,105.87 90 top
L34  1.0uH  [0805-WIDE]  129.08,103.67 180 top
L35  2.7nH  [0402-TIGHT]  135.24,105.87 0 top
L36  2.0nH  [0402-TIGHT]  137.78,105.87 0 top
LOGO1  SFE_LOGO_NAME_FLAME.1_INCH  [SFE_LOGO_NAME_FLAME_.1]  32.19,34.46 0 top
LOGO2  OSHW-LOGOS  [OSHW-LOGO-S]  24.19,17.86 0 top
LOGO3  SFE_LOGO_NAME_FLAME.1_INCH  [SFE_LOGO_NAME_FLAME_.1]  78.03,34.46 0 top
LOGO4  OSHW-LOGOS  [OSHW-LOGO-S]  70.03,17.86 0 top
LOGO5  SFE_LOGO_NAME_FLAME.1_INCH  [SFE_LOGO_NAME_FLAME_.1]  123.88,34.46 0 top
LOGO6  OSHW-LOGOS  [OSHW-LOGO-S]  115.88,17.86 0 top
LOGO7  SFE_LOGO_NAME_FLAME.1_INCH  [SFE_LOGO_NAME_FLAME_.1]  32.19,74.97 0 top
LOGO8  OSHW-LOGOS  [OSHW-LOGO-S]  24.19,58.37 0 top
LOGO9  SFE_LOGO_NAME_FLAME.1_INCH  [SFE_LOGO_NAME_FLAME_.1]  78.03,74.97 0 top
LOGO10  OSHW-LOGOS  [OSHW-LOGO-S]  70.03,58.37 0 top
LOGO11  SFE_LOGO_NAME_FLAME.1_INCH  [SFE_LOGO_NAME_FLAME_.1]  123.88,74.97 0 top
LOGO12  OSHW-LOGOS  [OSHW-LOGO-S]  115.88,58.37 0 top
LOGO13  SFE_LOGO_NAME_FLAME.1_INCH  [SFE_LOGO_NAME_FLAME_.1]  32.19,115.47 0 top
LOGO14  OSHW-LOGOS  [OSHW-LOGO-S]  24.19,98.87 0 top
LOGO15  SFE_LOGO_NAME_FLAME.1_INCH  [SFE_LOGO_NAME_FLAME_.1]  78.03,115.47 0 top
LOGO16  OSHW-LOGOS  [OSHW-LOGO-S]  70.03,98.87 0 top
LOGO17  SFE_LOGO_NAME_FLAME.1_INCH  [SFE_LOGO_NAME_FLAME_.1]  123.88,115.47 0 top
LOGO18  OSHW-LOGOS  [OSHW-LOGO-S]  115.88,98.87 0 top
M1  MEMS_MIC  [SPW2430HR5H-B]  20.19,43.86 180 top
M2  MEMS_MIC  [SPW2430HR5H-B]  20.19,9.86 0 top
M3  MEMS_MIC  [SPW2430HR5H-B]  66.03,43.86 180 top
M4  MEMS_MIC  [SPW2430HR5H-B]  66.03,9.86 0 top
M5  MEMS_MIC  [SPW2430HR5H-B]  111.88,43.86 180 top
M6  MEMS_MIC  [SPW2430HR5H-B]  111.88,9.86 0 top
M7  MEMS_MIC  [SPW2430HR5H-B]  20.19,84.37 180 top
M8  MEMS_MIC  [SPW2430HR5H-B]  20.19,50.37 0 top
M9  MEMS_MIC  [SPW2430HR5H-B]  66.03,84.37 180 top
M10  MEMS_MIC  [SPW2430HR5H-B]  66.03,50.37 0 top
M11  MEMS_MIC  [SPW2430HR5H-B]  111.88,84.37 180 top
M12  MEMS_MIC  [SPW2430HR5H-B]  111.88,50.37 0 top
M13  MEMS_MIC  [SPW2430HR5H-B]  20.19,124.87 180 top
M14  MEMS_MIC  [SPW2430HR5H-B]  20.19,90.87 0 top
M15  MEMS_MIC  [SPW2430HR5H-B]  66.03,124.87 180 top
M16  MEMS_MIC  [SPW2430HR5H-B]  66.03,90.87 0 top
M17  MEMS_MIC  [SPW2430HR5H-B]  111.88,124.87 180 top
M18  MEMS_MIC  [SPW2430HR5H-B]  111.88,90.87 0 top
R1  10k  [0402-TIGHT]  12.99,37.86 90 top
R2  0  [0402-TIGHT]  34.49,22.56 270 top
R3  10k  [0402-TIGHT]  44.19,39.86 0 top
R4  10k  [0402-TIGHT]  44.19,40.86 180 top
R5  1k  [0603]  27.19,13.86 90 top
R6  1k  [0603]  29.19,13.86 90 top
R7  1k  [0603]  33.19,13.86 90 top
R8  1k  [0603]  31.19,13.86 90 top
R9  10k  [0402-TIGHT]  21.69,15.86 270 top
R10  10k  [0402-TIGHT]  29.69,37.86 270 top
R11  10k  [0402-TIGHT]  41.19,36.86 270 top
R12  4.7k  [0603]  28.19,18.86 180 top
R13  4.7k  [0603]  28.19,37.86 270 top
R14  4.7k  [0603]  28.19,16.86 180 top
R15  4.7k  [0603]  26.69,37.86 270 top
R16  10k  [0603]  23.69,38.86 90 top
R17  10k  [0603]  24.19,13.36 0 top
R18  22k  [0402-TIGHT]  28.19,26.36 0 top
R19  10k  [0402-TIGHT]  28.19,25.36 180 top
R20  100k  [0603]  24.19,14.86 180 top
R21  100k  [0603]  22.94,36.46 0 top
R22  10k  [0402-TIGHT]  30.69,37.86 90 top
R23  4.7k  [0603]  48.19,31.86 0 top
R24  4.7k  [0603]  48.19,39.86 0 top
R25  10k  [0402-TIGHT]  33.27,20.83 270 top
R26  10k  [0402-TIGHT]  31.24,20.82 270 top
R27  10k  [0402-TIGHT]  58.83,37.86 90 top
R28  10k  [0402-TIGHT]  90.03,40.86 180 top
R29  10k  [0402-TIGHT]  90.03,39.86 0 top
R30  0  [0402-TIGHT]  80.33,22.56 270 top
R31  4.7k  [0603]  74.03,37.86 270 top
R32  4.7k  [0603]  72.53,37.86 270 top
R33  4.7k  [0603]  74.03,18.86 180 top
R34  4.7k  [0603]  74.03,16.86 180 top
R35  10k  [0402-TIGHT]  75.53,37.86 270 top
R36  10k  [0402-TIGHT]  67.53,15.86 270 top
R37  1k  [0603]  75.03,13.86 90 top
R38  1k  [0603]  73.03,13.86 90 top
R39  1k  [0603]  79.03,13.86 90 top
R40  1k  [0603]  77.03,13.86 90 top
R41  10k  [0402-TIGHT]  74.03,25.36 180 top
R42  22k  [0402-TIGHT]  74.03,26.36 0 top
R43  10k  [0603]  69.53,38.86 90 top
R44  100k  [0603]  68.78,36.46 0 top
R45  10k  [0603]  70.03,13.36 0 top
R46  100k  [0603]  70.03,14.86 180 top
R47  10k  [0402-TIGHT]  87.03,36.86 270 top
R48  10k  [0402-TIGHT]  76.53,37.86 90 top
R49  4.7k  [0603]  94.03,31.86 0 top
R50  4.7k  [0603]  94.03,39.86 0 top
R51  10k  [0402-TIGHT]  79.12,20.83 270 top
R52  10k  [0402-TIGHT]  77.08,20.82 270 top
R53  10k  [0402-TIGHT]  104.68,37.86 90 top
R54  10k  [0402-TIGHT]  135.88,40.86 180 top
R55  10k  [0402-TIGHT]  135.88,39.86 0 top
R56  0  [0402-TIGHT]  126.18,22.56 270 top
R57  4.7k  [0603]  119.88,37.86 270 top
R58  4.7k  [0603]  118.38,37.86 270 top
R59  4.7k  [0603]  119.88,18.86 180 top
R60  4.7k  [0603]  119.88,16.86 180 top
R61  10k  [0402-TIGHT]  121.38,37.86 270 top
R62  10k  [0402-TIGHT]  113.38,15.86 270 top
R63  1k  [0603]  120.88,13.86 90 top
R64  1k  [0603]  118.88,13.86 90 top
R65  1k  [0603]  124.88,13.86 90 top
R66  1k  [0603]  122.88,13.86 90 top
R67  10k  [0402-TIGHT]  119.88,25.36 180 top
R68  22k  [0402-TIGHT]  119.88,26.36 0 top
R69  10k  [0603]  115.38,38.86 90 top
R70  100k  [0603]  114.63,36.46 0 top
R71  10k  [0603]  115.88,13.36 0 top
R72  100k  [0603]  115.88,14.86 180 top
R73  10k  [0402-TIGHT]  132.88,36.86 270 top
R74  10k  [0402-TIGHT]  122.38,37.86 90 top
R75  4.7k  [0603]  139.88,31.86 0 top
R76  4.7k  [0603]  139.88,39.86 0 top
R77  10k  [0402-TIGHT]  124.96,20.83 270 top
R78  10k  [0402-TIGHT]  122.93,20.82 270 top
R79  10k  [0402-TIGHT]  12.99,78.37 90 top
R80  10k  [0402-TIGHT]  44.19,81.37 180 top
R81  10k  [0402-TIGHT]  44.19,80.37 0 top
R82  0  [0402-TIGHT]  34.49,63.07 270 top
R83  4.7k  [0603]  28.19,78.37 270 top
R84  4.7k  [0603]  26.69,78.37 270 top
R85  4.7k  [0603]  28.19,59.37 180 top
R86  4.7k  [0603]  28.19,57.37 180 top
R87  10k  [0402-TIGHT]  29.69,78.37 270 top
R88  10k  [0402-TIGHT]  21.69,56.37 270 top
R89  1k  [0603]  29.19,54.37 90 top
R90  1k  [0603]  27.19,54.37 90 top
R91  1k  [0603]  33.19,54.37 90 top
R92  1k  [0603]  31.19,54.37 90 top
R93  10k  [0402-TIGHT]  28.19,65.87 180 top
R94  22k  [0402-TIGHT]  28.19,66.87 0 top
R95  10k  [0603]  23.69,79.37 90 top
R96  100k  [0603]  22.94,76.97 0 top
R97  10k  [0603]  24.19,53.87 0 top
R98  100k  [0603]  24.19,55.37 180 top
R99  10k  [0402-TIGHT]  41.19,77.37 270 top
R100  10k  [0402-TIGHT]  30.69,78.37 90 top
R101  4.7k  [0603]  48.19,72.37 0 top
R102  4.7k  [0603]  48.19,80.37 0 top
R103  10k  [0402-TIGHT]  33.27,61.34 270 top
R104  10k  [0402-TIGHT]  31.24,61.33 270 top
R105  10k  [0402-TIGHT]  58.83,78.37 90 top
R106  10k  [0402-TIGHT]  90.03,81.37 180 top
R107  10k  [0402-TIGHT]  90.03,80.37 0 top
R108  0  [0402-TIGHT]  80.33,63.07 270 top
R109  4.7k  [0603]  74.03,78.37 270 top
R110  4.7k  [0603]  72.53,78.37 270 top
R111  4.7k  [0603]  74.03,59.37 180 top
R112  4.7k  [0603]  74.03,57.37 180 top
R113  10k  [0402-TIGHT]  75.53,78.37 270 top
R114  10k  [0402-TIGHT]  67.53,56.37 270 top
R115  1k  [0603]  75.03,54.37 90 top
R116  1k  [0603]  73.03,54.37 90 top
R117  1k  [0603]  79.03,54.37 90 top
R118  1k  [0603]  77.03,54.37 90 top
R119  10k  [0402-TIGHT]  74.03,65.87 180 top
R120  22k  [0402-TIGHT]  74.03,66.87 0 top
R121  10k  [0603]  69.53,79.37 90 top
R122  100k  [0603]  68.78,76.97 0 top
R123  10k  [0603]  70.03,53.87 0 top
R124  100k  [0603]  70.03,55.37 180 top
R125  10k  [0402-TIGHT]  87.03,77.37 270 top
R126  10k  [0402-TIGHT]  76.53,78.37 90 top
R127  4.7k  [0603]  94.03,72.37 0 top
R128  4.7k  [0603]  94.03,80.37 0 top
R129  10k  [0402-TIGHT]  79.12,61.34 270 top
R130  10k  [0402-TIGHT]  77.08,61.33 270 top
R131  10k  [0402-TIGHT]  104.68,78.37 90 top
R132  10k  [0402-TIGHT]  135.88,81.37 180 top
R133  10k  [0402-TIGHT]  135.88,80.37 0 top
R134  0  [0402-TIGHT]  126.18,63.07 270 top
R135  4.7k  [0603]  119.88,78.37 270 top
R136  4.7k  [0603]  118.38,78.37 270 top
R137  4.7k  [0603]  119.88,59.37 180 top
R138  4.7k  [0603]  119.88,57.37 180 top
R139  10k  [0402-TIGHT]  121.38,78.37 270 top
R140  10k  [0402-TIGHT]  113.38,56.37 270 top
R141  1k  [0603]  120.88,54.37 90 top
R142  1k  [0603]  118.88,54.37 90 top
R143  1k  [0603]  124.88,54.37 90 top
R144  1k  [0603]  122.88,54.37 90 top
R145  10k  [0402-TIGHT]  119.88,65.87 180 top
R146  22k  [0402-TIGHT]  119.88,66.87 0 top
R147  10k  [0603]  115.38,79.37 90 top
R148  100k  [0603]  114.63,76.97 0 top
R149  10k  [0603]  115.88,53.87 0 top
R150  100k  [0603]  115.88,55.37 180 top
R151  10k  [0402-TIGHT]  132.88,77.37 270 top
R152  10k  [0402-TIGHT]  122.38,78.37 90 top
R153  4.7k  [0603]  139.88,72.37 0 top
R154  4.7k  [0603]  139.88,80.37 0 top
R155  10k  [0402-TIGHT]  124.96,61.34 270 top
R156  10k  [0402-TIGHT]  122.93,61.33 270 top
R157  10k  [0402-TIGHT]  12.99,118.87 90 top
R158  10k  [0402-TIGHT]  44.19,121.87 180 top
R159  10k  [0402-TIGHT]  44.19,120.87 0 top
R160  0  [0402-TIGHT]  34.49,103.57 270 top
R161  4.7k  [0603]  28.19,118.87 270 top
R162  4.7k  [0603]  26.69,118.87 270 top
R163  4.7k  [0603]  28.19,99.87 180 top
R164  4.7k  [0603]  28.19,97.87 180 top
R165  10k  [0402-TIGHT]  29.69,118.87 270 top
R166  10k  [0402-TIGHT]  21.69,96.87 270 top
R167  1k  [0603]  29.19,94.87 90 top
R168  1k  [0603]  27.19,94.87 90 top
R169  1k  [0603]  33.19,94.87 90 top
R170  1k  [0603]  31.19,94.87 90 top
R171  10k  [0402-TIGHT]  28.19,106.37 180 top
R172  22k  [0402-TIGHT]  28.19,107.37 0 top
R173  10k  [0603]  23.69,119.87 90 top
R174  100k  [0603]  22.94,117.47 0 top
R175  10k  [0603]  24.19,94.37 0 top
R176  100k  [0603]  24.19,95.87 180 top
R177  10k  [0402-TIGHT]  41.19,117.87 270 top
R178  10k  [0402-TIGHT]  30.69,118.87 90 top
R179  4.7k  [0603]  48.19,112.87 0 top
R180  4.7k  [0603]  48.19,120.87 0 top
R181  10k  [0402-TIGHT]  33.27,101.84 270 top
R182  10k  [0402-TIGHT]  31.24,101.84 270 top
R183  10k  [0402-TIGHT]  58.83,118.87 90 top
R184  10k  [0402-TIGHT]  90.03,121.87 180 top
R185  10k  [0402-TIGHT]  90.03,120.87 0 top
R186  0  [0402-TIGHT]  80.33,103.57 270 top
R187  4.7k  [0603]  74.03,118.87 270 top
R188  4.7k  [0603]  72.53,118.87 270 top
R189  4.7k  [0603]  74.03,99.87 180 top
R190  4.7k  [0603]  74.03,97.87 180 top
R191  10k  [0402-TIGHT]  75.53,118.87 270 top
R192  10k  [0402-TIGHT]  67.53,96.87 270 top
R193  1k  [0603]  75.03,94.87 90 top
R194  1k  [0603]  73.03,94.87 90 top
R195  1k  [0603]  79.03,94.87 90 top
R196  1k  [0603]  77.03,94.87 90 top
R197  10k  [0402-TIGHT]  74.03,106.37 180 top
R198  22k  [0402-TIGHT]  74.03,107.37 0 top
R199  10k  [0603]  69.53,119.87 90 top
R200  100k  [0603]  68.78,117.47 0 top
R201  10k  [0603]  70.03,94.37 0 top
R202  100k  [0603]  70.03,95.87 180 top
R203  10k  [0402-TIGHT]  87.03,117.87 270 top
R204  10k  [0402-TIGHT]  76.53,118.87 90 top
R205  4.7k  [0603]  94.03,112.87 0 top
R206  4.7k  [0603]  94.03,120.87 0 top
R207  10k  [0402-TIGHT]  79.12,101.84 270 top
R208  10k  [0402-TIGHT]  77.08,101.84 270 top
R209  10k  [0402-TIGHT]  104.68,118.87 90 top
R210  10k  [0402-TIGHT]  135.88,121.87 180 top
R211  10k  [0402-TIGHT]  135.88,120.87 0 top
R212  0  [0402-TIGHT]  126.18,103.57 270 top
R213  4.7k  [0603]  119.88,118.87 270 top
R214  4.7k  [0603]  118.38,118.87 270 top
R215  4.7k  [0603]  119.88,99.87 180 top
R216  4.7k  [0603]  119.88,97.87 180 top
R217  10k  [0402-TIGHT]  121.38,118.87 270 top
R218  10k  [0402-TIGHT]  113.38,96.87 270 top
R219  1k  [0603]  120.88,94.87 90 top
R220  1k  [0603]  118.88,94.87 90 top
R221  1k  [0603]  124.88,94.87 90 top
R222  1k  [0603]  122.88,94.87 90 top
R223  10k  [0402-TIGHT]  119.88,106.37 180 top
R224  22k  [0402-TIGHT]  119.88,107.37 0 top
R225  10k  [0603]  115.38,119.87 90 top
R226  100k  [0603]  114.63,117.47 0 top
R227  10k  [0603]  115.88,94.37 0 top
R228  100k  [0603]  115.88,95.87 180 top
R229  10k  [0402-TIGHT]  132.88,117.87 270 top
R230  10k  [0402-TIGHT]  122.38,118.87 90 top
R231  4.7k  [0603]  139.88,112.87 0 top
R232  4.7k  [0603]  139.88,120.87 0 top
R233  10k  [0402-TIGHT]  124.96,101.84 270 top
R234  10k  [0402-TIGHT]  122.93,101.84 270 top
S1  [TACTILE_SWITCH_SMD_5.2MM]  17.19,15.86 180 top
S2  [TACTILE_SWITCH_SMD_5.2MM]  17.19,37.86 0 top
S3  [TACTILE_SWITCH_SMD_5.2MM]  63.03,15.86 180 top
S4  [TACTILE_SWITCH_SMD_5.2MM]  63.03,37.86 0 top
S5  [TACTILE_SWITCH_SMD_5.2MM]  108.88,15.86 180 top
S6  [TACTILE_SWITCH_SMD_5.2MM]  108.88,37.86 0 top
S7  [TACTILE_SWITCH_SMD_5.2MM]  17.19,56.37 180 top
S8  [TACTILE_SWITCH_SMD_5.2MM]  17.19,78.37 0 top
S9  [TACTILE_SWITCH_SMD_5.2MM]  63.03,56.37 180 top
S10  [TACTILE_SWITCH_SMD_5.2MM]  63.03,78.37 0 top
S11  [TACTILE_SWITCH_SMD_5.2MM]  108.88,56.37 180 top
S12  [TACTILE_SWITCH_SMD_5.2MM]  108.88,78.37 0 top
S13  [TACTILE_SWITCH_SMD_5.2MM]  17.19,96.87 180 top
S14  [TACTILE_SWITCH_SMD_5.2MM]  17.19,118.87 0 top
S15  [TACTILE_SWITCH_SMD_5.2MM]  63.03,96.87 180 top
S16  [TACTILE_SWITCH_SMD_5.2MM]  63.03,118.87 0 top
S17  [TACTILE_SWITCH_SMD_5.2MM]  108.88,96.87 180 top
S18  [TACTILE_SWITCH_SMD_5.2MM]  108.88,118.87 0 top
TP1  TEST-POINT3X5  [PAD.03X.05]  43.94,42.42 0 bottom
TP2  TEST-POINT3X5  [PAD.03X.05]  46.48,42.42 0 bottom
TP3  TEST-POINT3X5  [PAD.03X.05]  50.29,37.08 0 bottom
TP4  TEST-POINT3X5  [PAD.03X.05]  50.29,34.54 0 bottom
TP5  TEST-POINT3X5  [PAD.03X.05]  16,39.88 0 bottom
TP6  TEST-POINT3X5  [PAD.03X.05]  16,37.34 0 bottom
TP7  TEST-POINT3X5  [PAD.03X.05]  31.19,39.96 0 bottom
TP8  TEST-POINT3X5  [PAD.03X.05]  89.78,42.42 0 bottom
TP9  TEST-POINT3X5  [PAD.03X.05]  92.32,42.42 0 bottom
TP10  TEST-POINT3X5  [PAD.03X.05]  96.13,37.08 0 bottom
TP11  TEST-POINT3X5  [PAD.03X.05]  96.13,34.54 0 bottom
TP12  TEST-POINT3X5  [PAD.03X.05]  61.84,39.88 0 bottom
TP13  TEST-POINT3X5  [PAD.03X.05]  61.84,37.34 0 bottom
TP14  TEST-POINT3X5  [PAD.03X.05]  77.03,39.96 0 bottom
TP15  TEST-POINT3X5  [PAD.03X.05]  135.63,42.42 0 bottom
TP16  TEST-POINT3X5  [PAD.03X.05]  138.17,42.42 0 bottom
TP17  TEST-POINT3X5  [PAD.03X.05]  141.98,37.08 0 bottom
TP18  TEST-POINT3X5  [PAD.03X.05]  141.98,34.54 0 bottom
TP19  TEST-POINT3X5  [PAD.03X.05]  107.69,39.88 0 bottom
TP20  TEST-POINT3X5  [PAD.03X.05]  107.69,37.34 0 bottom
TP21  TEST-POINT3X5  [PAD.03X.05]  122.88,39.96 0 bottom
TP22  TEST-POINT3X5  [PAD.03X.05]  43.94,82.93 0 bottom
TP23  TEST-POINT3X5  [PAD.03X.05]  46.48,82.93 0 bottom
TP24  TEST-POINT3X5  [PAD.03X.05]  50.29,77.59 0 bottom
TP25  TEST-POINT3X5  [PAD.03X.05]  50.29,75.05 0 bottom
TP26  TEST-POINT3X5  [PAD.03X.05]  16,80.39 0 bottom
TP27  TEST-POINT3X5  [PAD.03X.05]  16,77.85 0 bottom
TP28  TEST-POINT3X5  [PAD.03X.05]  31.19,80.47 0 bottom
TP29  TEST-POINT3X5  [PAD.03X.05]  89.78,82.93 0 bottom
TP30  TEST-POINT3X5  [PAD.03X.05]  92.32,82.93 0 bottom
TP31  TEST-POINT3X5  [PAD.03X.05]  96.13,77.59 0 bottom
TP32  TEST-POINT3X5  [PAD.03X.05]  96.13,75.05 0 bottom
TP33  TEST-POINT3X5  [PAD.03X.05]  61.84,80.39 0 bottom
TP34  TEST-POINT3X5  [PAD.03X.05]  61.84,77.85 0 bottom
TP35  TEST-POINT3X5  [PAD.03X.05]  77.03,80.47 0 bottom
TP36  TEST-POINT3X5  [PAD.03X.05]  135.63,82.93 0 bottom
TP37  TEST-POINT3X5  [PAD.03X.05]  138.17,82.93 0 bottom
TP38  TEST-POINT3X5  [PAD.03X.05]  141.98,77.59 0 bottom
TP39  TEST-POINT3X5  [PAD.03X.05]  141.98,75.05 0 bottom
TP40  TEST-POINT3X5  [PAD.03X.05]  107.69,80.39 0 bottom
TP41  TEST-POINT3X5  [PAD.03X.05]  107.69,77.85 0 bottom
TP42  TEST-POINT3X5  [PAD.03X.05]  122.88,80.47 0 bottom
TP43  TEST-POINT3X5  [PAD.03X.05]  43.94,123.43 0 bottom
TP44  TEST-POINT3X5  [PAD.03X.05]  46.48,123.43 0 bottom
TP45  TEST-POINT3X5  [PAD.03X.05]  50.29,118.1 0 bottom
TP46  TEST-POINT3X5  [PAD.03X.05]  50.29,115.56 0 bottom
TP47  TEST-POINT3X5  [PAD.03X.05]  16,120.89 0 bottom
TP48  TEST-POINT3X5  [PAD.03X.05]  16,118.35 0 bottom
TP49  TEST-POINT3X5  [PAD.03X.05]  31.19,120.98 0 bottom
TP50  TEST-POINT3X5  [PAD.03X.05]  89.78,123.43 0 bottom
TP51  TEST-POINT3X5  [PAD.03X.05]  92.32,123.43 0 bottom
TP52  TEST-POINT3X5  [PAD.03X.05]  96.13,118.1 0 bottom
TP53  TEST-POINT3X5  [PAD.03X.05]  96.13,115.56 0 bottom
TP54  TEST-POINT3X5  [PAD.03X.05]  61.84,120.89 0 bottom
TP55  TEST-POINT3X5  [PAD.03X.05]  61.84,118.35 0 bottom
TP56  TEST-POINT3X5  [PAD.03X.05]  77.03,120.98 0 bottom
TP57  TEST-POINT3X5  [PAD.03X.05]  135.63,123.43 0 bottom
TP58  TEST-POINT3X5  [PAD.03X.05]  138.17,123.43 0 bottom
TP59  TEST-POINT3X5  [PAD.03X.05]  141.98,118.1 0 bottom
TP60  TEST-POINT3X5  [PAD.03X.05]  141.98,115.56 0 bottom
TP61  TEST-POINT3X5  [PAD.03X.05]  107.69,120.89 0 bottom
TP62  TEST-POINT3X5  [PAD.03X.05]  107.69,118.35 0 bottom
TP63  TEST-POINT3X5  [PAD.03X.05]  122.88,120.98 0 bottom
U1  AMBIQ-APOLLO3KBR  [BGA-81-5X5MM]  38.19,26.86 90 top
U2  LIS2DH12  [LGA-12-LISDH12]  32.19,17.86 0 top
U3  1.8V  [SOT23-5]  38.69,37.86 0 top
U4  LMV358  [SO08]  26.19,29.86 270 top
U5  AMBIQ-APOLLO3KBR  [BGA-81-5X5MM]  84.03,26.86 90 top
U6  LIS2DH12  [LGA-12-LISDH12]  78.03,17.86 0 top
U7  1.8V  [SOT23-5]  84.53,37.86 0 top
U8  LMV358  [SO08]  72.03,29.86 270 top
U9  AMBIQ-APOLLO3KBR  [BGA-81-5X5MM]  129.88,26.86 90 top
U10  LIS2DH12  [LGA-12-LISDH12]  123.88,17.86 0 top
U11  1.8V  [SOT23-5]  130.38,37.86 0 top
U12  LMV358  [SO08]  117.88,29.86 270 top
U13  AMBIQ-APOLLO3KBR  [BGA-81-5X5MM]  38.19,67.37 90 top
U14  LIS2DH12  [LGA-12-LISDH12]  32.19,58.37 0 top
U15  1.8V  [SOT23-5]  38.69,78.37 0 top
U16  LMV358  [SO08]  26.19,70.37 270 top
U17  AMBIQ-APOLLO3KBR  [BGA-81-5X5MM]  84.03,67.37 90 top
U18  LIS2DH12  [LGA-12-LISDH12]  78.03,58.37 0 top
U19  1.8V  [SOT23-5]  84.53,78.37 0 top
U20  LMV358  [SO08]  72.03,70.37 270 top
U21  AMBIQ-APOLLO3KBR  [BGA-81-5X5MM]  129.88,67.37 90 top
U22  LIS2DH12  [LGA-12-LISDH12]  123.88,58.37 0 top
U23  1.8V  [SOT23-5]  130.38,78.37 0 top
U24  LMV358  [SO08]  117.88,70.37 270 top
U25  AMBIQ-APOLLO3KBR  [BGA-81-5X5MM]  38.19,107.87 90 top
U26  LIS2DH12  [LGA-12-LISDH12]  32.19,98.87 0 top
U27  1.8V  [SOT23-5]  38.69,118.87 0 top
U28  LMV358  [SO08]  26.19,110.87 270 top
U29  AMBIQ-APOLLO3KBR  [BGA-81-5X5MM]  84.03,107.87 90 top
U30  LIS2DH12  [LGA-12-LISDH12]  78.03,98.87 0 top
U31  1.8V  [SOT23-5]  84.53,118.87 0 top
U32  LMV358  [SO08]  72.03,110.87 270 top
U33  AMBIQ-APOLLO3KBR  [BGA-81-5X5MM]  129.88,107.87 90 top
U34  LIS2DH12  [LGA-12-LISDH12]  123.88,98.87 0 top
U35  1.8V  [SOT23-5]  130.38,118.87 0 top
U36  LMV358  [SO08]  117.88,110.87 270 top
U$1  [MIC00]  18.11,46.1 0 top
U$2  [BLK2]  16.76,19.18 0 top
U$3  [GND0]  45.85,10.67 45 top
U$4  [VDD1]  35.05,11.68 90 top
U$5  [10]  37.59,11.68 90 top
U$6  [383]  40.13,11.68 90 top
U$7  [364]  42.67,11.68 90 top
U$8  [10]  37.59,11.68 90 bottom
U$9  [VDD1]  35.05,11.68 90 bottom
U$10  [31]  45.21,11.68 90 bottom
U$11  [383]  40.13,11.68 90 bottom
U$12  [364]  42.67,11.68 90 bottom
U$13  [31]  45.21,11.68 90 top
U$14  [GND0]  45.85,10.67 135 bottom
U$15  [461]  27.18,6.6 90 top
U$16  [372]  29.21,6.6 90 top
U$17  [443]  31.24,6.6 90 top
U$18  [470]  33.27,6.6 90 top
U$19  [QWIIC_COPYRIGHT_SMALL]  49.15,30.23 0 top
U$20  [CAMERA3]  40.64,45.21 0 top
U$21  [POWEREDBY_TF#JPG]  44.45,18.54 0 top
U$22  [MIC11]  18.19,7.59 0 top
U$23  [EDGE0]  40.75,40.82 0 bottom
U$24  [EDGE0]  29.08,32.51 0 top
U$25  [POWEREDBY_TF#JPG]  24.59,10.3 0 bottom
U$26  [1416]  15.59,12.36 0 top
U$27  [RST15]  14.89,41.36 0 top
U$28  [GRN1]  16.76,34.54 0 top
U$29  [SFE_LOGO_NAME_.1]  36.83,42.86 0 bottom
U$30  [OSHW-LOGO-S]  18.83,42.86 0 bottom
U$31  [GND0]  91.69,10.67 45 top
U$32  [VDD1]  80.89,11.68 90 top
U$33  [383]  85.97,11.68 90 top
U$34  [364]  88.51,11.68 90 top
U$35  [VDD1]  80.89,11.68 90 bottom
U$36  [383]  85.97,11.68 90 bottom
U$37  [364]  88.51,11.68 90 bottom
U$38  [GND0]  91.69,10.67 135 bottom
U$39  [1416]  61.43,12.36 0 top
U$40  [RST15]  60.73,41.36 0 top
U$41  [BLK2]  62.61,19.18 0 top
U$42  [GRN1]  62.61,34.54 0 top
U$43  [10]  83.43,11.68 90 top
U$44  [10]  83.43,11.68 90 bottom
U$45  [31]  91.05,11.68 90 bottom
U$46  [31]  91.05,11.68 90 top
U$47  [461]  73.02,6.6 90 top
U$48  [372]  75.05,6.6 90 top
U$49  [443]  77.08,6.6 90 top
U$50  [470]  79.12,6.6 90 top
U$51  [QWIIC_COPYRIGHT_SMALL]  94.99,30.23 0 top
U$52  [CAMERA3]  86.48,45.21 0 top
U$53  [POWEREDBY_TF#JPG]  90.29,18.54 0 top
U$54  [EDGE0]  74.92,32.51 0 top
U$55  [MIC00]  63.95,46.1 0 top
U$56  [MIC11]  64.03,7.59 0 top
U$57  [EDGE0]  86.59,40.82 0 bottom
U$58  [POWEREDBY_TF#JPG]  70.43,10.3 0 bottom
U$59  [SFE_LOGO_NAME_.1]  82.67,42.86 0 bottom
U$60  [OSHW-LOGO-S]  64.67,42.86 0 bottom
U$61  [GND0]  137.53,10.67 45 top
U$62  [VDD1]  126.74,11.68 90 top
U$63  [383]  131.82,11.68 90 top
U$64  [364]  134.36,11.68 90 top
U$65  [VDD1]  126.74,11.68 90 bottom
U$66  [383]  131.82,11.68 90 bottom
U$67  [364]  134.36,11.68 90 bottom
U$68  [GND0]  137.53,10.67 135 bottom
U$69  [1416]  107.28,12.36 0 top
U$70  [RST15]  106.58,41.36 0 top
U$71  [BLK2]  108.45,19.18 0 top
U$72  [GRN1]  108.45,34.54 0 top
U$73  [10]  129.28,11.68 90 top
U$74  [10]  129.28,11.68 90 bottom
U$75  [31]  136.9,11.68 90 bottom
U$76  [31]  136.9,11.68 90 top
U$77  [461]  118.86,6.6 90 top
U$78  [372]  120.89,6.6 90 top
U$79  [443]  122.93,6.6 90 top
U$80  [470]  124.96,6.6 90 top
U$81  [QWIIC_COPYRIGHT_SMALL]  140.83,30.23 0 top
U$82  [CAMERA3]  132.32,45.21 0 top
U$83  [POWEREDBY_TF#JPG]  136.13,18.54 0 top
U$84  [EDGE0]  120.77,32.51 0 top
U$85  [MIC00]  109.79,46.1 0 top
U$86  [MIC11]  109.87,7.59 0 top
U$87  [EDGE0]  132.43,40.82 0 bottom
U$88  [POWEREDBY_TF#JPG]  116.28,10.3 0 bottom
U$89  [SFE_LOGO_NAME_.1]  128.52,42.86 0 bottom
U$90  [OSHW-LOGO-S]  110.52,42.86 0 bottom
U$91  [GND0]  45.85,51.18 45 top
U$92  [VDD1]  35.05,52.19 90 top
U$93  [383]  40.13,52.19 90 top